# Altium PCB ExG_shield_old.PcbDoc (part 1 of 3)
Units mm, origin at the board's own origin, x right, y up, seen from the top; angles counter-clockwise.
Board outline 21.95 x 29 mm, 6 copper layers (Top Layer, GND/PWR1, SIG1, SIG2, GND/PWR2, Bottom Layer), stack 0.957 mm thick; 110 components, 127 nets, 621 pads, 432 vias.
Unrouted connection lines stored in the file: 2.
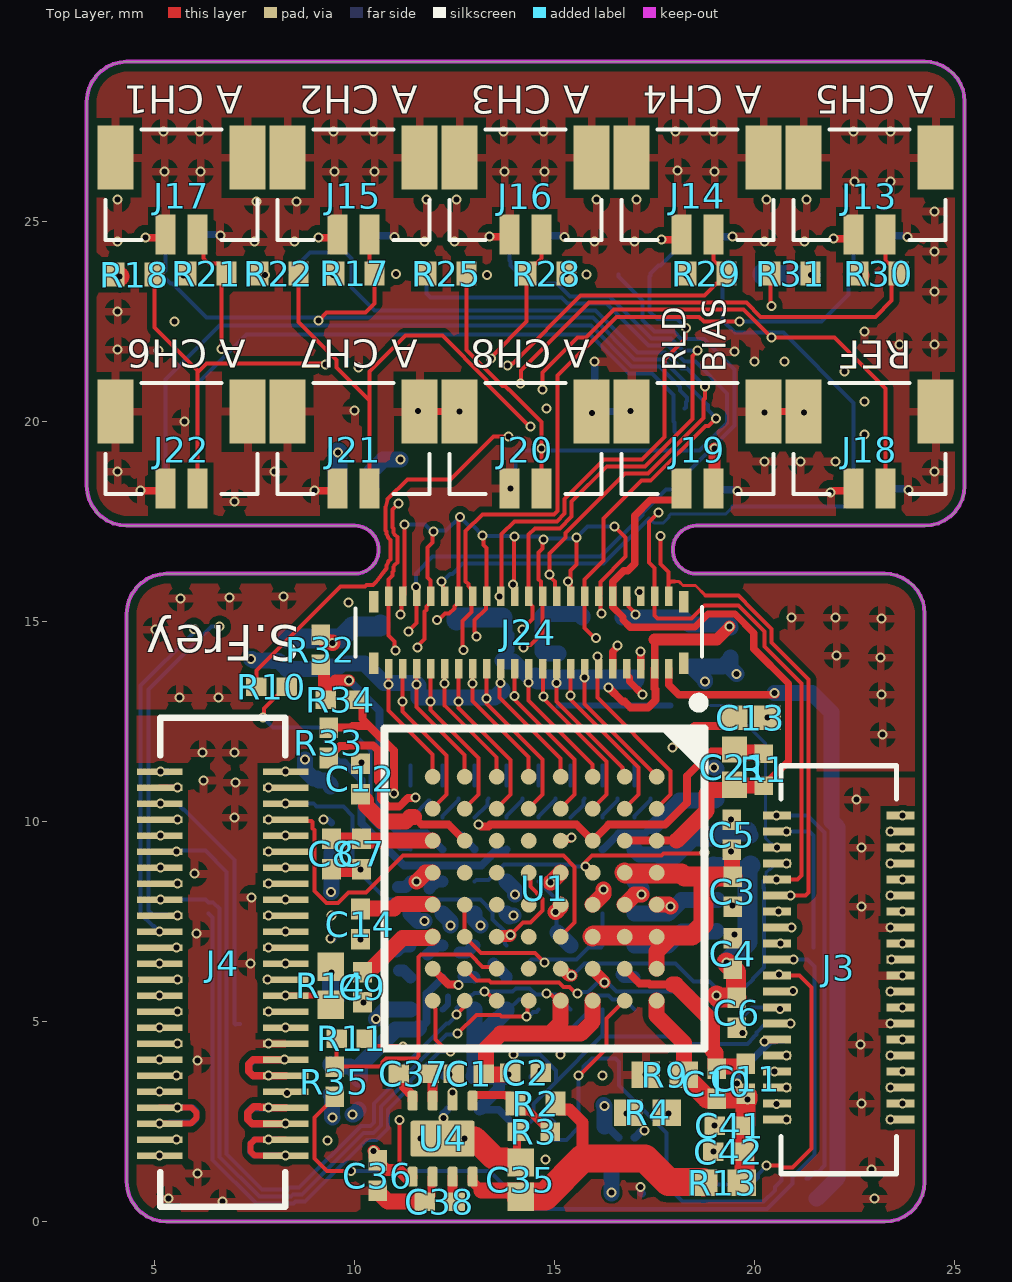
[diagram p0: Top Layer view]
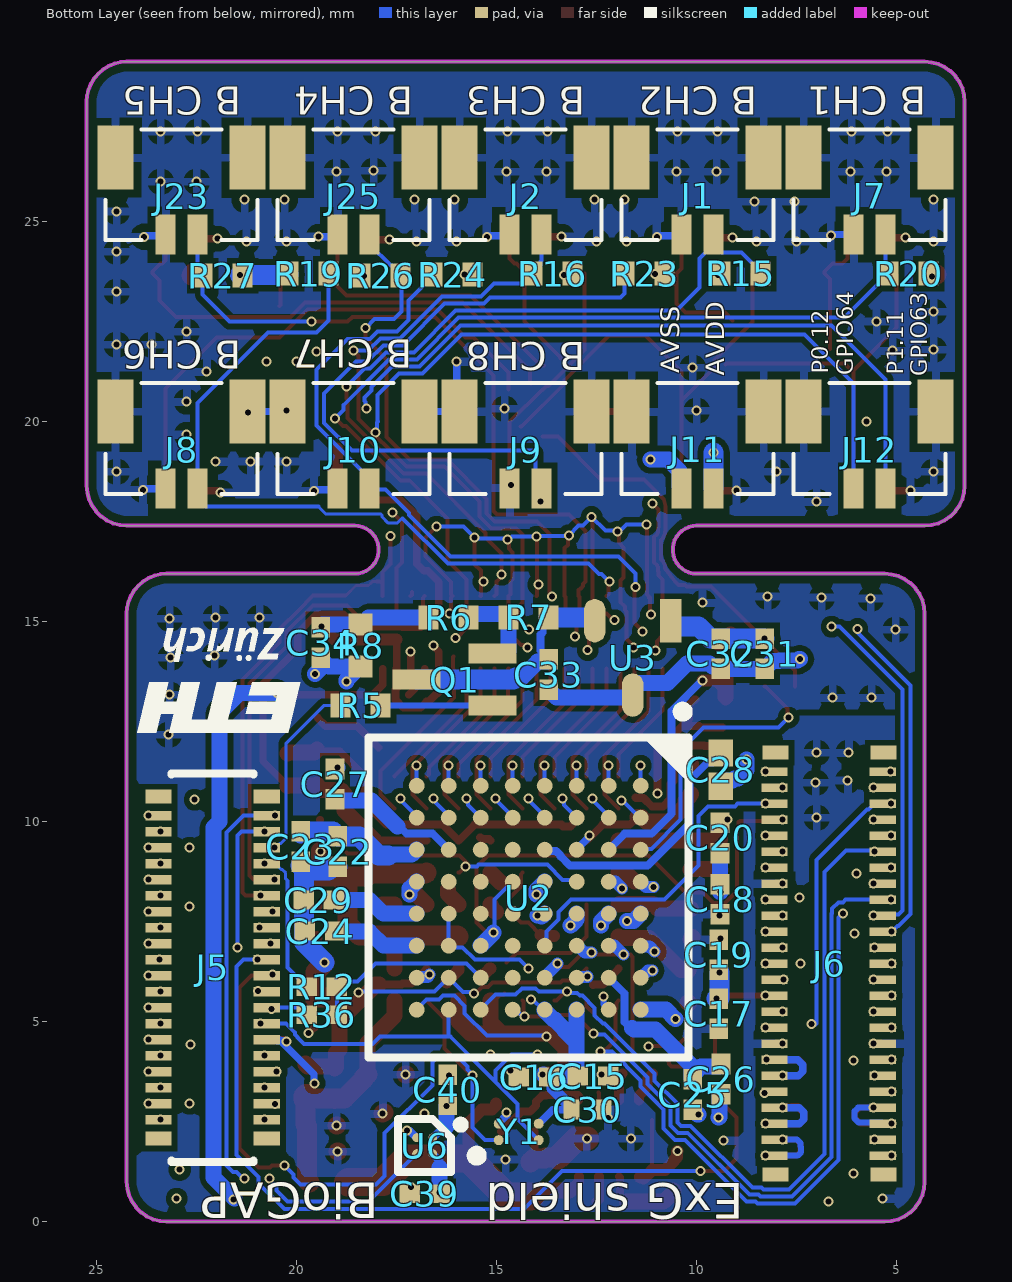
[diagram p1: Bottom Layer view, seen from below]
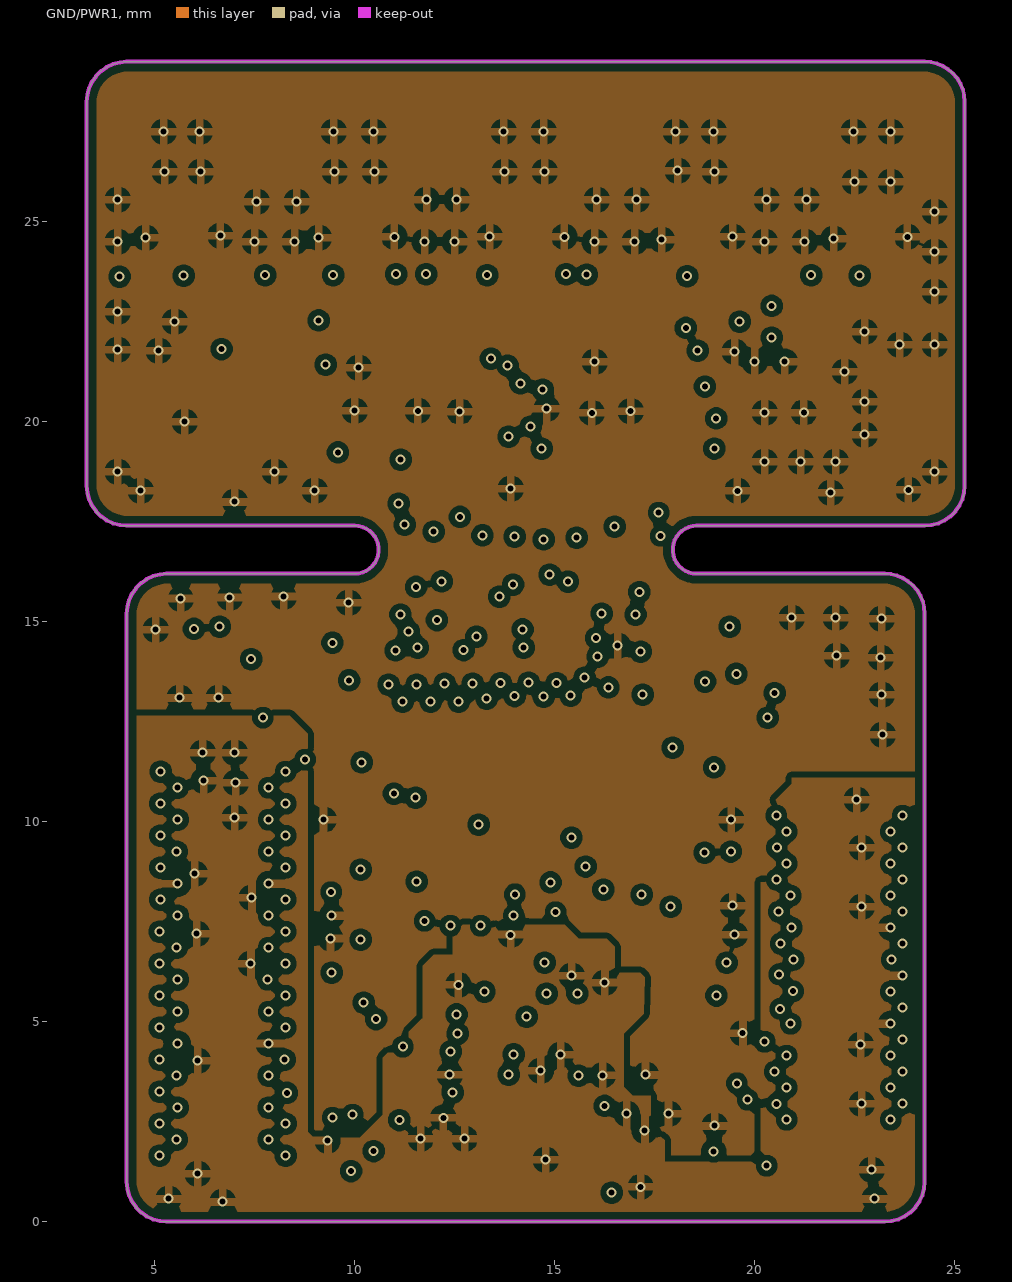
[diagram p2: GND/PWR1]
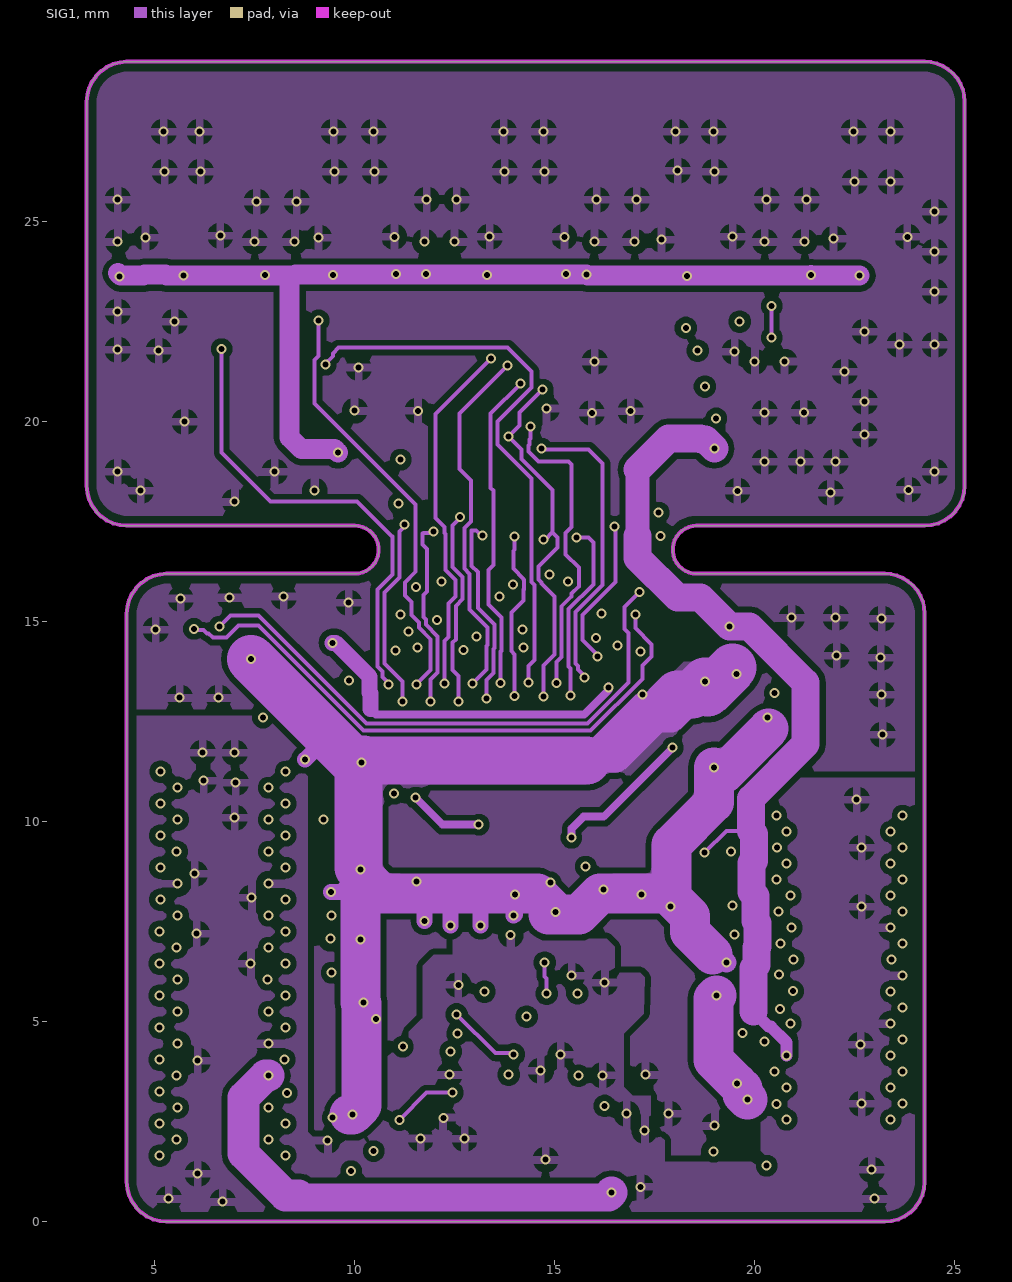
[diagram p3: SIG1]
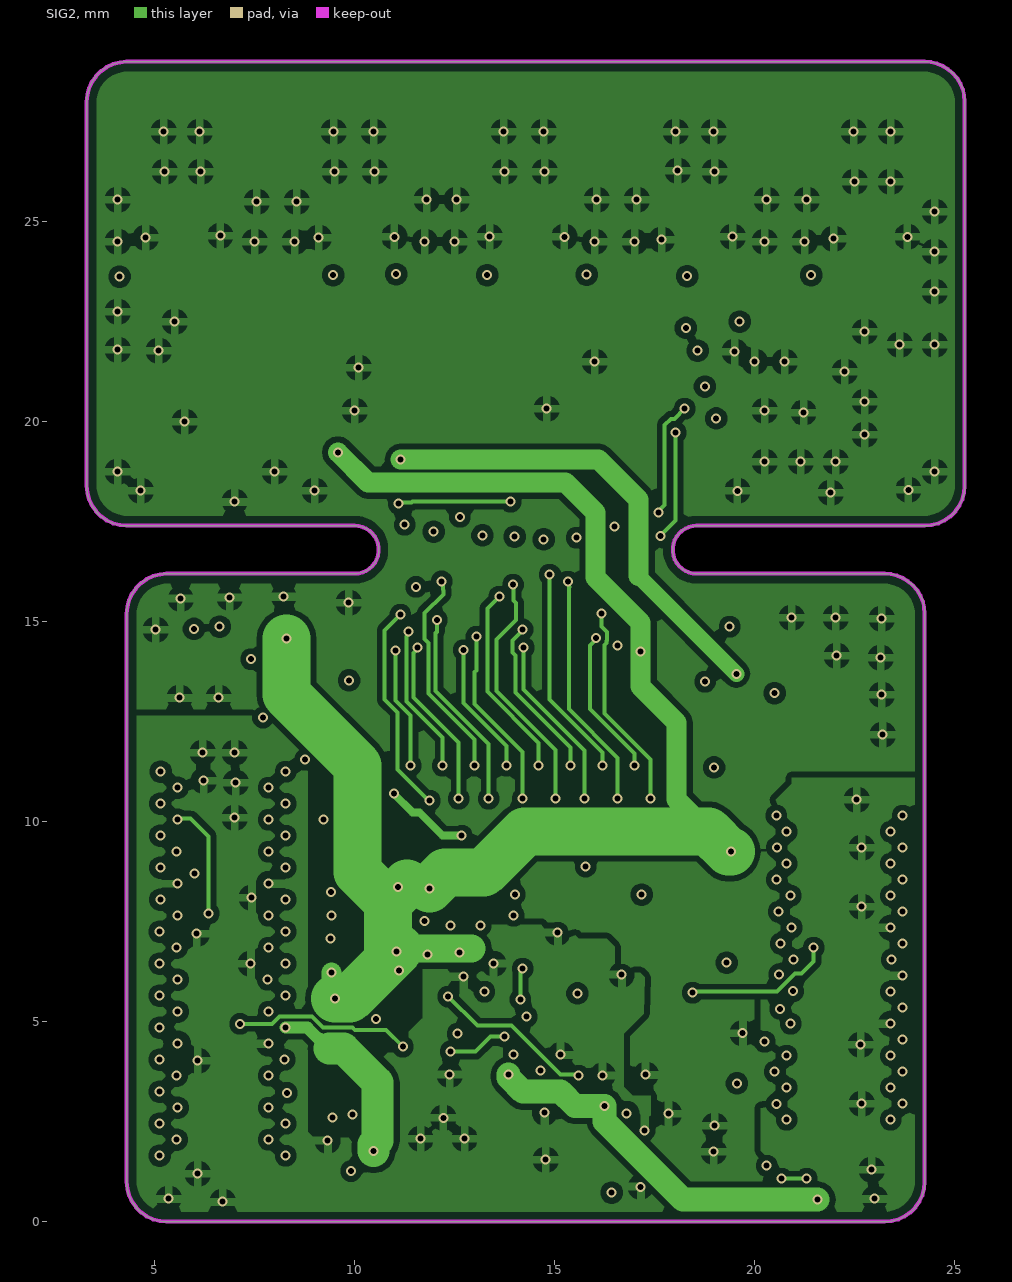
[diagram p4: SIG2]
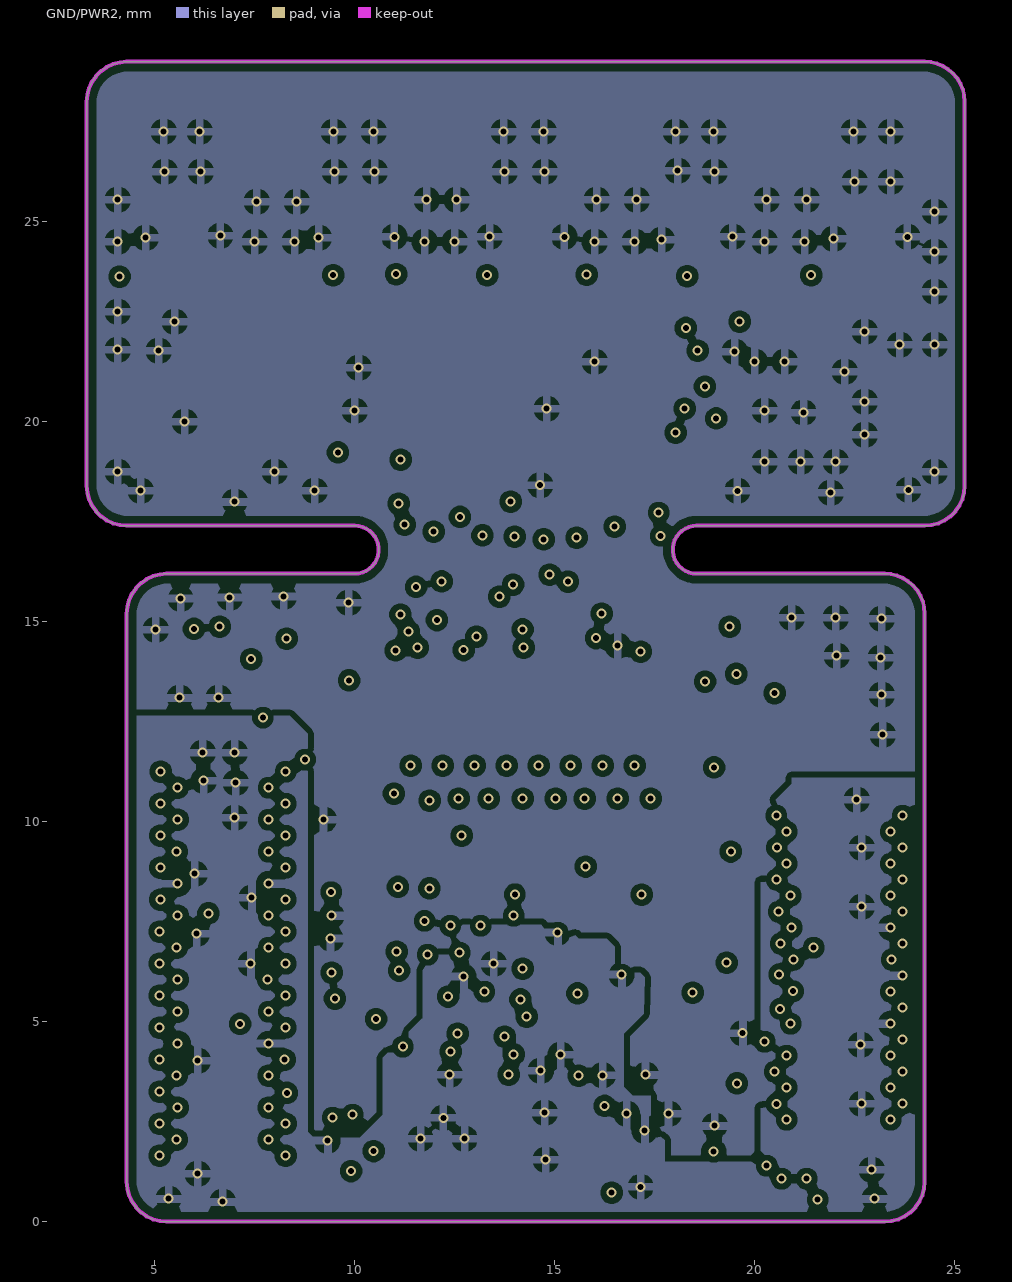
[diagram p5: GND/PWR2]
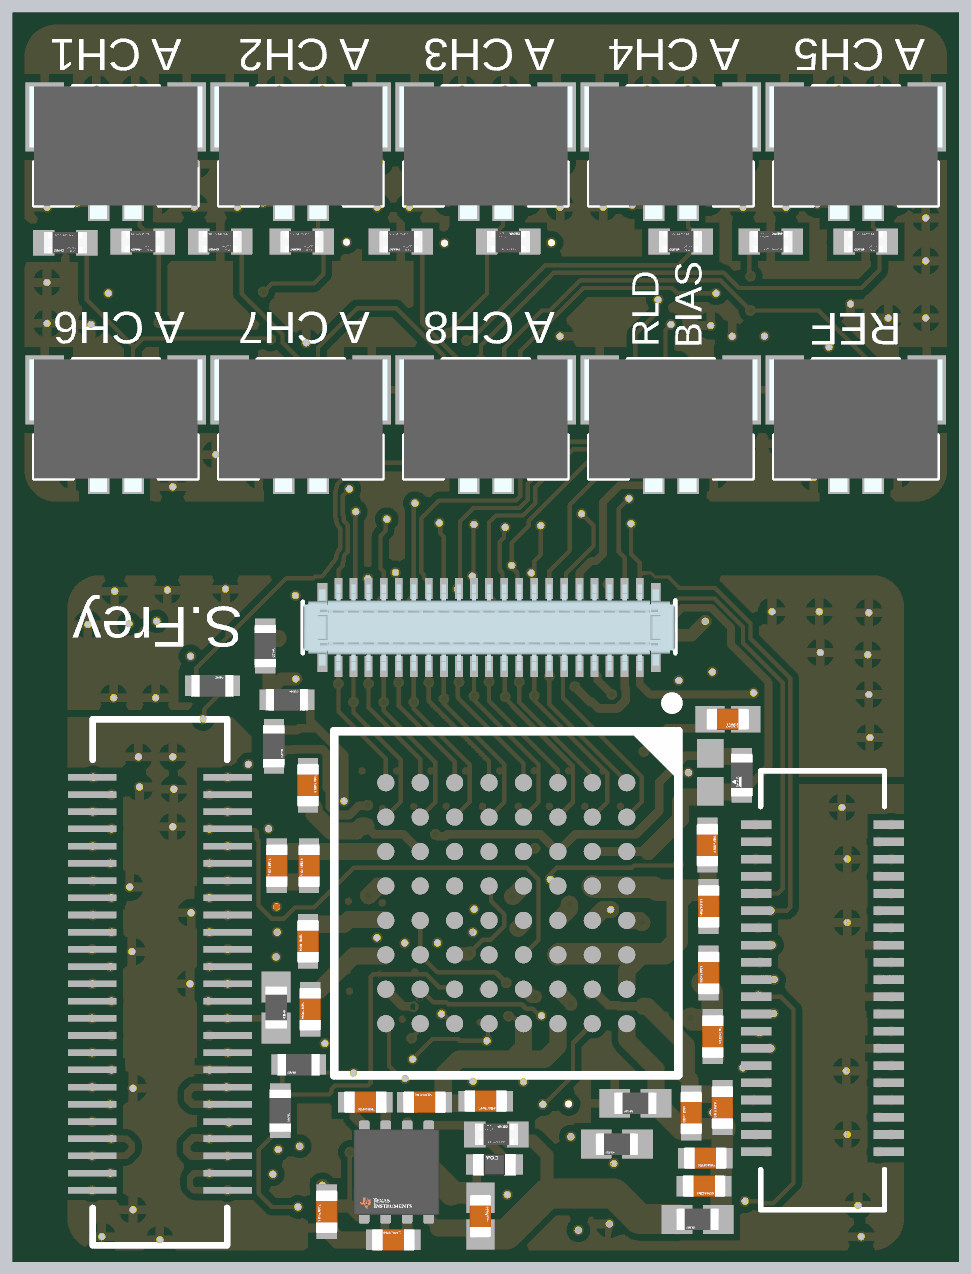
[diagram p7: 3D render of the assembled board from above, using the file's embedded part models]
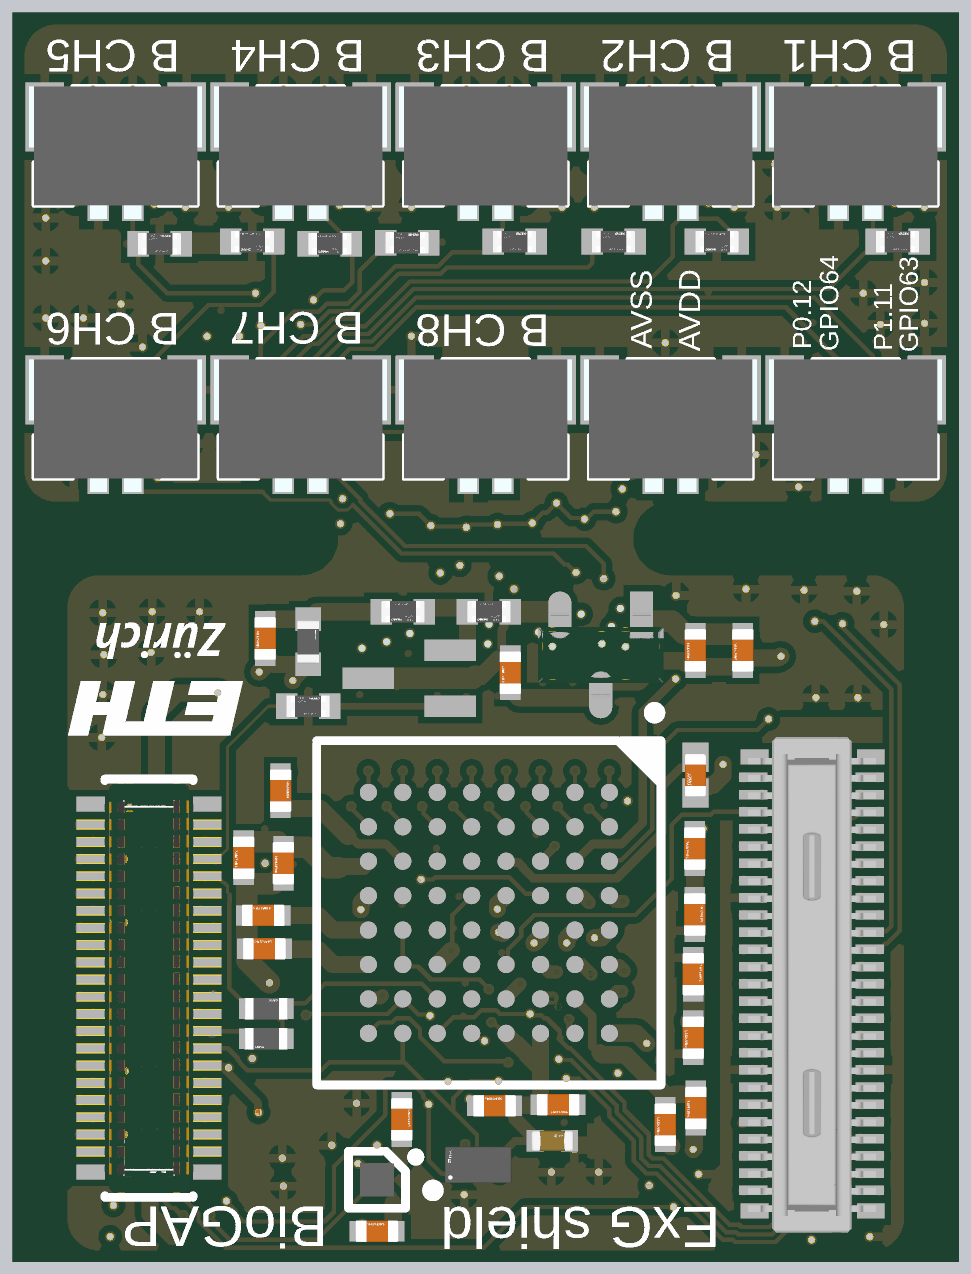
[diagram p8: 3D render of the assembled board from below, using the file's embedded part models]

## Layer stack, top to bottom
Top Solder: solder mask 0.0102, Solder Resist, Dk 3.5
Top Layer: signal copper 0.0175
Dielectric1: prepreg 0.13, PP-021, Dk 4.27
GND/PWR1: signal copper 0.0356
Dielectric2: core 0.13, Core-023, Dk 4.6
SIG1: signal copper 0.0356
Dielectric 1: prepreg 0.13, PP-021, Dk 4.27
Dielectric 2: prepreg 0.13, PP-021, Dk 4.27
SIG2: signal copper 0.0356
Dielectric 3: core 0.13, Core-023, Dk 4.6
GND/PWR2: signal copper 0.0356
Dielectric 4: prepreg 0.13, PP-021, Dk 4.27
Bottom Layer: signal copper 0.0175
Board Layer Stack Bottom Solder: solder mask 0.0102, Solder Resist, Dk 3.5

## Board outline
4.3,1 4.3,15.2 cw(c5.3,15.2) 5.3,16.2 10,16.2 ccw(c10,16.8) 10,17.4 4.3,17.4 cw(c4.3,18.4) 3.3,18.4 3.3,28 cw(c4.3,28) 4.3,29 24.25,29 cw(c24.25,28) 25.25,28 25.25,18.4 cw(c24.25,18.4) 24.25,17.4 18.55,17.4 ccw(c18.55,16.8) 18.55,16.2 23.25,16.2 cw(c23.25,15.2) 24.25,15.2 24.25,1 cw(c23.25,1) 23.25,0 5.3,0 cw(c5.3,1)

## Design rules (kind name [scope] priority, off if disabled: settings)
BoardOutlineClearance [All] p1: gap=0.25 ignorepadtopadclearanceinfootprint=FALSE except(0: Arc-SplitContinuation Track-SplitContinuation SMDPad-SplitContinuation THPad-SplitContinuation Via-SplitContinuation Fill-SplitContinuation Poly-SplitContinuation Region-SplitContinuation Text-SplitContinuation)
Clearance Clearance-xPP-xTP-xTT [All] p1: gap=0.1 ignorepadtopadclearanceinfootprint=TRUE except(0.075: Arc-Arc Arc-Track Track-Track; 0.15: Arc-Fill Arc-Poly Arc-Region Track-Fill Track-Poly Track-Region SMDPad-Fill SMDPad-Poly SMDPad-Region THPad-Fill THPad-Poly THPad-Region Via-Fill Via-Poly Via-Region Fill-Fill Fill-Poly Fill-Region Poly-Poly Poly-Region Region-Region)
ComponentClearance ComponentClearance_Mechanical [OnMechanical] p1: gap=0 collisioncheckmode=3 verticalgap=0 showdistances=FALSE
ComponentClearance [All] p2: gap=0.1 collisioncheckmode=3 verticalgap=0.1 showdistances=FALSE
DiffPairsRouting [All] p1: maxlimit=0.25 minlimit=0.15 mostfreqgap=0.25 toplayer_minwidth=0.15 toplayer_maxwidth=0.4 toplayer_prefwidth=0.2 midlayer1_minwidth=0.15 midlayer1_maxwidth=0.4 midlayer1_prefwidth=0.2 midlayer2_mingap=0.25 midlayer2_minwidth=0.381 midlayer2_maxwidth=0.381 midlayer2_prefwidth=0.381 midlayer3_mingap=0.25 midlayer3_minwidth=0.381 midlayer3_maxwidth=0.381 midlayer3_prefwidth=0.381 midlayer4_minwidth=0.15 midlayer4_maxwidth=0.4 midlayer4_prefwidth=0.2 bottomlayer_minwidth=0.15 bottomlayer_maxwidth=0.4 bottomlayer_prefwidth=0.2 maxuncoupledlength=12.5
Height [All] p1: minheight=0 maxheight=25 prefheight=12.5
HoleSize HoleSize-VIA [IsVia] p1: absolutevalues=TRUE maxlimit=6.2 minlimit=0.15 maxpercent=80.000 minpercent=20.000
HoleSize HoleSize-PTH [All] p2: absolutevalues=TRUE maxlimit=6.2 minlimit=0.2 maxpercent=80.000 minpercent=20.000
HoleToHoleClearance [All] p1: gap=0.3 allowstackedmicrovias=FALSE
MatchedLengths MatchedLengths_D100_InPair [InDifferentialPairClass('100Ohm')] p1: tolerance=0.1 checknetsindiffpair=TRUE checkdiffpairvsdiffpair=FALSE checkxsignals=FALSE checkothers=FALSE
MatchedLengths MatchedLengths_D100 [InDifferentialPairClass('100Ohm')] p2: tolerance=0.2 checknetsindiffpair=FALSE checkdiffpairvsdiffpair=TRUE checkxsignals=TRUE checkothers=TRUE
MaximumViaCount MaximumViaCount_D100 [InDifferentialPairClass('100Ohm')] p1: limit=2
MinimumSolderMaskSliver [All] p1: minsoldermaskwidth=0.08
PlaneClearance PlaneClearance-IPI [All] p1: clearance=0.25
PlaneConnect [All] p1: planeconnectstyle=Relief reliefexpansion=0.175 reliefentries=4 reliefconductorwidth=0.2 reliefairgap=0.2
PolygonConnect PolygonConnect-xTW [All] p1: connectstyle=Relief reliefconductorwidth=0.2 reliefentries=4 polygonreliefangle="90 Angle" airgapwidth=0.2
ReturnPath ReturnPath_S50 [InNetClass('50Ohm')] p1: impedanceprofileid={A2B40DEE-A9E4-4B6C-8169-857D678A89D5} _gaplimit=2.3
ReturnPath ReturnPath_D100 [InDifferentialPairClass('100Ohm')] p2: impedanceprofileid={66C9644C-2042-4FCB-B803-7A79EBC78C8C} _gaplimit=2.3
RoutingCorners [All] p1: cornerstyle=45-Degree minsetback=2.5 maxsetback=2.5
RoutingVias [All] p1: holewidth=0.15 width=0.25 viastyle="Through Hole" minholewidth=0.15 minwidth=0.25 maxholewidth=0.15 maxwidth=0.25 // finishet hole size <= 0.45mm
SilkToSilkClearance [All] p1: silktosilkclearance=0
SilkToSolderMaskClearance SilkscreenOverComponentPads [IsPad] p1: minsilkscreentomaskgap=0.05 clearancetoexposedcopper=TRUE
SolderMaskExpansion SolderMaskExpansion_VIA [(ObjectKind = 'Via')] p1: expansion=0 istentingtop=TRUE
SolderMaskExpansion [All] p2: expansion=0 istentingtop=FALSE
UnRoutedNet [All] p1: checkbadconnections=TRUE
Width Width_S50 [InNetClass('50Ohm')] p1: maxlimit=0.305 minlimit=0.104 preferedwidth=0.115 bottomlayer_minwidth=0.178 bottomlayer_prefwidth=0.246 impedanceprofiledriven=TRUE impedanceprofileid={A2B40DEE-A9E4-4B6C-8169-857D678A89D5} impedanceprofilevalue=50.000000 minimp=50.000000 maximp=50.000000 favimp=50.000000
Width Width-xTW [All] p2: maxlimit=1.5 minlimit=0.075 preferedwidth=0.1
Width [InNetClass('Power')] p3: maxlimit=2 minlimit=0.15 preferedwidth=0.2 midlayer2_minwidth=0.254 midlayer2_maxwidth=0.254 midlayer2_prefwidth=0.254 midlayer3_minwidth=0.254 midlayer3_maxwidth=0.254 midlayer3_prefwidth=0.254 minimp=50.000000 maximp=50.000000 favimp=50.000000
18 further rules are at their usual default settings.

## Classes and differential pairs
component class 03_electrode_interface: J1 J2 J7 J8 J9 J10 J11 J12 J13 J14 J15 J16 J17 J18 J19 J20 J21 J22 J23 J24 J25 R15 R16 R17 R18 R19 R20 R21 R22 R23 R24 R25 R26 R27 R28 R29 R30 R31
component class 01_power: C35 C36 C37 C38 C39 C40 C41 C42 R2 R3 R13 R14 U4 U6
component class 02_AFE: C1 C2 C3 C4 C5 C6 C7 C8 C9 C10 C11 C12 C13 C14 C15 C16 C17 C18 C19 C20 C21 C22 C23 C24 C25 C26 C27 C28 C29 C30 C31 C32 C33 C34 Q1 R1 R4 R5 R6 R7 R8 R9 R10 R11 R12 R32 R33 R34 R35 R36 U1 U2 U3 Y1
net class CSI2_DATA: CSI_D0_N CSI_D0_P
net class CSI2_CLK: CSI_CLK_N CSI_CLK_P
component class 04_gap_interface: J4 J5 J6

## Components (designator, comment, footprint, x,y, rotation, side; value= is the part's Value field where it differs from the comment)
C1 "CL05A104KA5NNNC" FP-CL278-IPC_C 12.85,3.7 r180 top
C2 "CL05A105KP5NNNC" FP-CL511-IPC_C 14.271,3.725 r0 top
C3 "CL05A104KA5NNNC" FP-CL278-IPC_C 19.45,8.25 r270 top
C4 "CL05A104KA5NNNC" FP-CL278-IPC_C 19.45,6.704 r270 top
C5 "CL05A105KP5NNNC" FP-CL511-IPC_C 19.425,9.675 r90 top
C6 "CL05A105KP5NNNC" FP-CL511-IPC_C 19.55,5.225 r90 top
C7 "CL05A104KA5NNNC" FP-CL278-IPC_C 10.167,9.194 r270 top
C8 "CL05A106MP8NUB8" FP-CL07-IPC_C 9.417,9.194 r270 top
C9 "CL05A105KP5NNNC" FP-CL511-IPC_C 10.192,5.861 r270 top
C10 "CL05A104KA5NNNC" FP-CL278-IPC_C 19.05,3.45 r270 top
C11 "CL05A105KP5NNNC" FP-CL511-IPC_C 19.775,3.575 r270 top
C12 "CL05A105KP5NNNC" FP-CL511-IPC_C 10.142,11.069 r90 top
C13 "04025C102KAT2A" FP-0402-L_1_0_1-W_0_5_0_1-IPC_B 19.9,12.6 r0 top
C14 "CL05A226MQ5QUNC" FP-CL746-IPC_C 10.142,7.44 r270 top
C15 "CL05A104KA5NNNC" FP-CL278-IPC_C 12.592,3.64 r180 bottom
C16 "CL05A105KP5NNNC" FP-CL511-IPC_C 14.067,3.615 r0 bottom
C17 "CL05A104KA5NNNC" FP-CL278-IPC_C 9.45,5.2 r270 bottom
C18 "CL05A104KA5NNNC" FP-CL278-IPC_C 9.417,8.061 r90 bottom
C19 "CL05A105KP5NNNC" FP-CL511-IPC_C 9.45,6.675 r90 bottom
C20 "CL05A105KP5NNNC" FP-CL511-IPC_C 9.417,9.594 r270 bottom
C21 "GRM155R71H152KA01D" CAPC1005X55X25NL05T10 19.492,11.365 r270 top
C22 "CL05A104KA5NNNC" FP-CL278-IPC_C 18.975,9.254 r270 bottom
C23 "CL05A106MP8NUB8" FP-CL07-IPC_C 19.9,9.379 r270 bottom
C24 "CL05A105KP5NNNC" FP-CL511-IPC_C 19.417,7.265 r0 bottom
C25 "CL05A104KA5NNNC" FP-CL278-IPC_C 10.1,3.179 r270 bottom
C26 "CL05A105KP5NNNC" FP-CL511-IPC_C 9.392,3.565 r270 bottom
C27 "CL05A105KP5NNNC" FP-CL511-IPC_C 19.042,10.94 r90 bottom
C28 "04025C102KAT2A" FP-0402-L_1_0_1-W_0_5_0_1-IPC_B 9.4,11.3 r270 bottom
C29 "CL05A226MQ5QUNC" FP-CL746-IPC_C 19.446,8.04 r0 bottom
C30 "CGA2B3X7R1V103K050BB" FP-CGA2B-MFG 12.725,2.8 r180 bottom
C31 "CL05A106MP8NUB8" FP-CL07-IPC_C 8.3,14.2 r270 bottom
C32 "CL05A104KA5NNNC" FP-CL278-IPC_C 9.4,14.2 r270 bottom
C33 "CL05A104KA5NNNC" FP-CL278-IPC_C 13.7,13.679 r270 bottom
C34 "CL05A104KA5NNNC" FP-CL278-IPC_C 19.4,14.479 r270 bottom
C35 "GRM155Z71A225KE01D" FP-GRM155-0_15-IPC_B 14.15,1.052 r90 top
C36 "CL05A475MP5NRNC" FP-CL282-IPC_C 10.575,1.154 r270 top
C37 "CL05A105KP5NNNC" FP-CL511-IPC_C 11.475,3.7 r0 top
C38 "CL05A475MP5NRNC" FP-CL282-IPC_C 12.125,0.5 r180 top
C39 "CL05A105KP5NNNC" FP-CL511-IPC_C 16.8,0.7 r0 bottom
C40 "CL05A104KA5NNNC" FP-CL278-IPC_C 16.225,3.3 r90 bottom
C41 "CL05A104KA5NNNC" FP-CL278-IPC_C 19.375,2.4 r0 top
C42 "CL05A105KP5NNNC" FP-CL511-IPC_C 19.346,1.75 r0 top
J1 "DF52-2S-0.8H_21_" DF522S08H21 9.975,25.57 r0 bottom
J2 "DF52-2S-0.8H_21_" DF522S08H21 14.275,25.57 r0 bottom
J3 "DF40HC(2.5)-40DS-0.4V(51)" DF40HC3040DS04V51 22.1,6.35 r270 top locked
J4 "DF40HC(2.5)-50DS-0.4V(51)" DF40HC3050DS04V51 6.7,6.45 r90 top locked
J5 "DF40C-40DP-0.4V(51)" FP-DF40C-40DP-0_4V_51-MFG 22.1,6.35 r270 bottom locked
J6 "DF40C-50DP-0.4V(51)" CONN_COMBI_50P 6.7,6.45 r0 bottom locked
J7 "DF52-2S-0.8H_21_" DF522S08H21 5.675,25.57 r0 bottom
J8 "DF52-2S-0.8H_21_" DF522S08H21 22.875,19.225 r0 bottom
J9 "DF52-2S-0.8H_21_" DF522S08H21 14.275,19.225 r0 bottom
J10 "DF52-2S-0.8H_21_" DF522S08H21 18.575,19.225 r0 bottom
J11 "DF52-2S-0.8H_21_" DF522S08H21 9.975,19.225 r0 bottom
J12 "DF52-2S-0.8H_21_" DF522S08H21 5.675,19.225 r0 bottom
J13 "DF52-2S-0.8H_21_" DF522S08H21 22.875,25.57 r180 top
J14 "DF52-2S-0.8H_21_" DF522S08H21 18.575,25.57 r180 top
J15 "DF52-2S-0.8H_21_" DF522S08H21 9.975,25.57 r180 top
J16 "DF52-2S-0.8H_21_" DF522S08H21 14.275,25.57 r180 top
J17 "DF52-2S-0.8H_21_" DF522S08H21 5.675,25.57 r180 top
J18 "DF52-2S-0.8H_21_" DF522S08H21 22.875,19.225 r180 top
J19 "DF52-2S-0.8H_21_" DF522S08H21 18.575,19.225 r180 top
J20 "DF52-2S-0.8H_21_" DF522S08H21 14.275,19.225 r180 top
J21 "DF52-2S-0.8H_21_" DF522S08H21 9.975,19.225 r180 top
J22 "DF52-2S-0.8H_21_" DF522S08H21 5.675,19.225 r180 top
J23 "DF52-2S-0.8H_21_" DF522S08H21 22.875,25.57 r0 bottom
J24 "505070-4222" 5050704222 14.35,14.732 r180 top
J25 "DF52-2S-0.8H_21_" DF522S08H21 18.575,25.57 r0 bottom
Q1 "PMSS3906" SOT323_N 16.05,13.55 r0 bottom
R1 "MCS04020C1004FE000" FP-MCS0402-IPC_C 20.225,11.3 r270 top
R2 "RT0402BRD0745K3L" FP-RT0402-MFG 14.522,2.95 r0 top value=45.3KΩ
R3 "RN73R1ETTP2003B25" FP-RN73R1E-IPC_C 14.475,2.25 r180 top
R4 "RC0402FR-070RL" FP-RC0402-0_4-IPC_A 17.321,2.725 r180 top
R5 "RT0402FRE074K7L" FP-RT0402-MFG 18.4,12.9 r180 bottom value=4.7KΩ
R6 "RT0402FRE074K7L" FP-RT0402-MFG 16.2,15.1 r0 bottom value=4.7KΩ
R7 "RT0402FRE074K7L" FP-RT0402-MFG 14.2,15.1 r0 bottom value=4.7KΩ
R8 "RR0510P-563-D" FP-RR0510-MFG 18.4,14.4 r90 bottom
R9 "RC0402FR-070RL" FP-RC0402-0_4-IPC_A 17.75,3.675 r180 top
R10 "RC0402FR-070RL" FP-RC0402-0_4-IPC_C 7.921,13.375 r0 top
R11 "RC0402FR-070RL" FP-RC0402-0_4-IPC_C 9.925,4.575 r180 top
R12 "RC0402FR-070RL" FP-RC0402-0_4-IPC_C 19.375,5.875 r180 bottom
R13 "RC0402FR-070RL" FP-RC0402-0_4-IPC_A 19.196,0.975 r180 top
R14 "RC0402FR-070RL" FP-RC0402-0_4-IPC_A 9.4,5.9 r270 top
R15 "RT0402FRE074K7L" FP-RT0402-MFG 8.9,23.7 r0 bottom value=4.7KΩ
R16 "RT0402FRE074K7L" FP-RT0402-MFG 13.6,23.7 r180 bottom value=4.7KΩ
R17 "RT0402FRE074K7L" FP-RT0402-MFG 10,23.7 r180 top value=4.7KΩ
R18 "RT0402FRE074K7L" FP-RT0402-MFG 4.5,23.675 r180 top value=4.7KΩ
R19 "RT0402FRE074K7L" FP-RT0402-MFG 19.7,23.7 r0 bottom value=4.7KΩ
R20 "RT0402FRE074K7L" FP-RT0402-MFG 4.7,23.7 r180 bottom value=4.7KΩ
R21 "RT0402FRE074K7L" FP-RT0402-MFG 6.3,23.7 r180 top value=4.7KΩ
R22 "RT0402FRE074K7L" FP-RT0402-MFG 8.1,23.7 r180 top value=4.7KΩ
R23 "RT0402FRE074K7L" FP-RT0402-MFG 11.3,23.7 r180 bottom value=4.7KΩ
R24 "RT0402FRE074K7L" FP-RT0402-MFG 16.1,23.675 r180 bottom value=4.7KΩ
R25 "RT0402FRE074K7L" FP-RT0402-MFG 12.3,23.7 r180 top value=4.7KΩ
R26 "RT0402FRE074K7L" FP-RT0402-MFG 17.9,23.65 r0 bottom value=4.7KΩ
R27 "RT0402FRE074K7L" FP-RT0402-MFG 21.85,23.65 r180 bottom value=4.7KΩ
R28 "RT0402FRE074K7L" FP-RT0402-MFG 14.8,23.7 r0 top value=4.7KΩ
R29 "RT0402FRE074K7L" FP-RT0402-MFG 18.8,23.7 r180 top value=4.7KΩ
R30 "RT0402FRE074K7L" FP-RT0402-MFG 23.1,23.7 r180 top value=4.7KΩ
R31 "RT0402FRE074K7L" FP-RT0402-MFG 20.9,23.7 r0 top value=4.7KΩ
R32 "RC0402FR-070RL" FP-RC0402-0_4-IPC_C 9.15,14.3 r270 top
R33 "RC0402FR-070RL" FP-RC0402-0_4-IPC_C 9.35,11.971 r270 top
R34 "RC0402FR-070RL" FP-RC0402-0_4-IPC_C 9.654,13.05 r0 top
R35 "RC0402FR-070RL" FP-RC0402-0_4-IPC_C 9.5,3.5 r270 top
R36 "RC0402FR-070RL" FP-RC0402-0_4-IPC_C 19.375,5.175 r0 bottom
U1 "ADS1298RIZXGT" TI-ZXG64 14.75,8.325 r270 top
U2 "ADS1298RIZXGT" TI-ZXG64 14.2,8.1 r270 bottom
U3 "ISL21080CIH320Z-TK" FP-P3_064A-IPC_C 11.6,14.095 r270 bottom
U4 "LM27761DSGT" FP-DSG0008A-MFG 12.197,2.075 r90 top
U6 "TPS22916CYFPR" BGA4C40P2X2_78X78X50 16.8,1.9 r270 bottom
Y1 "SIT8021AC-J3-18S-2.048000" FP-SiT8021-MFG 14.45,2.245 r180 bottom

## Footprints (in the part's own frame and the unit in brackets; to place one, negate y for a bottom-side part, rotate by r counter-clockwise, add the part's x,y. Pads: shape width x height; smd on the part's side, far side on the other; paste and mask are expansions set on the pad)
5050704222 [mm]
  rect 0.18x0.485 smd: 1(-3.5,-0.907) 2(-3.5,0.907) 3(-3.15,-0.907) 4(-3.15,0.907) 5(-2.8,-0.907) 6(-2.8,0.907) 7(-2.45,-0.907) 8(-2.45,0.907) 9(-2.1,-0.907) 10(-2.1,0.907) 11(-1.75,-0.907) 12(-1.75,0.907) 13(-1.4,-0.907) 14(-1.4,0.907) 15(-1.05,-0.907) 16(-1.05,0.907) 17(-0.7,-0.907) 18(-0.7,0.907) 19(-0.35,-0.907) 20(-0.35,0.907) 21(0,-0.907) 22(0,0.907) 23(0.35,-0.907) 24(0.35,0.907) 25(0.7,-0.907) 26(0.7,0.907) 27(1.05,-0.907) 28(1.05,0.907) 29(1.4,-0.907) 30(1.4,0.907) 31(1.75,-0.907) 32(1.75,0.907) 33(2.1,-0.907) 34(2.1,0.907) 35(2.45,-0.907) 36(2.45,0.907) 37(2.8,-0.907) 38(2.8,0.907) 39(3.15,-0.907) 40(3.15,0.907) 41(3.5,-0.907) 42(3.5,0.907)
  rect 0.23x0.535 smd: MP1(-3.875,-0.768) MP2(3.875,-0.768) MP3(3.875,0.768) MP4(-3.875,0.768)
  silkscreen extent -4.33,-0.63 4.33,0.6, body extent -4.33,-1 4.33,1, height 0.49
BGA4C40P2X2_78X78X50 [mm]
  round 0.226 smd: A1(-0.2,0.2) A2(0.2,0.2) B1(-0.2,-0.2) B2(0.2,-0.2)
  silkscreen extent -0.66,-0.66 0.66,1, body extent -0.39,-0.39 0.39,0.39, height 0.5
CAPC1005X55X25NL05T10 [mm] "Chip Capacitor, 2-Leads, Body 1.00x0.50mm, IPC Medium Density"
  rect 0.66x0.62 smd: 1(-0.44,0) 2(0.44,0)
  body extent -0.53,-0.28 0.53,0.27, height 0.55
CONN_COMBI_50P [mm] "50Pin 0.4mm pitch connector footprint that accepts (male) connectors intended for different stacking heights:  Hirose - DF40C-50DP-0.4V(51) for 1.5mm - 3mm stacking height , JAE - WP7B-P050VA1-R8000 - for 0.7mm stacking height"
  rect 0.66x0.22 smd: 1(1.355,4.8) 2(1.355,4.4) 3(1.355,4) 4(1.355,3.6) 5(1.355,3.2) 6(1.355,2.8) 7(1.355,2.4) 8(1.355,2) 9(1.355,1.6) 10(1.355,1.2) 11(1.355,0.8) 12(1.355,0.4) 13(1.355,0) 14(1.355,-0.4) 15(1.355,-0.8) 16(1.355,-1.2) 17(1.355,-1.6) 18(1.355,-2) 19(1.355,-2.4) 20(1.355,-2.8) 21(1.355,-3.2) 22(1.355,-3.6) 23(1.355,-4) 24(1.355,-4.4) 25(1.355,-4.8) 26(-1.355,-4.8) 27(-1.355,-4.4) 28(-1.355,-4) 29(-1.355,-3.6) 30(-1.355,-3.2) 31(-1.355,-2.8) 32(-1.355,-2.4) 33(-1.355,-2) 34(-1.355,-1.6) 35(-1.355,-1.2) 36(-1.355,-0.8) 37(-1.355,-0.4) 38(-1.355,0) 39(-1.355,0.4) 40(-1.355,0.8) 41(-1.355,1.2) 42(-1.355,1.6) 43(-1.355,2) 44(-1.355,2.4) 45(-1.355,2.8) 46(-1.355,3.2) 47(-1.355,3.6) 48(-1.355,4) 49(-1.355,4.4) 50(-1.355,4.8)
  rect 0.65x0.35 smd: 56(-1.375,-5.275) 56(-1.375,5.275) 56(1.325,-5.275) 56(1.325,5.275)
  body extent -1.49,-5.74 1.48,5.78, height 1.14
DF40HC3040DS04V51 [mm]
  rect 0.2x0.7 smd: 1(-3.8,1.54) 2(-3.8,-1.54) 3(-3.4,1.54) 4(-3.4,-1.54) 5(-3,1.54) 6(-3,-1.54) 7(-2.6,1.54) 8(-2.6,-1.54) 9(-2.2,1.54) 10(-2.2,-1.54) 11(-1.8,1.54) 12(-1.8,-1.54) 13(-1.4,1.54) 14(-1.4,-1.54) 15(-1,1.54) 16(-1,-1.54) 17(-0.6,1.54) 18(-0.6,-1.54) 19(-0.2,1.54) 20(-0.2,-1.54) 21(0.2,1.54) 22(0.2,-1.54) 23(0.6,1.54) 24(0.6,-1.54) 25(1,1.54) 26(1,-1.54) 27(1.4,1.54) 28(1.4,-1.54) 29(1.8,1.54) 30(1.8,-1.54) 31(2.2,1.54) 32(2.2,-1.54) 33(2.6,1.54) 34(2.6,-1.54) 35(3,1.54) 36(3,-1.54) 37(3.4,1.54) 38(3.4,-1.54) 39(3.8,1.54) 40(3.8,-1.54)
  silkscreen extent -5.05,-1.44 5.15,1.44
DF40HC3050DS04V51 [mil]
  rect 6x44.56 smd paste+0 mask+0: 1(-188.98,-62) 2(-173.23,-62) 3(-157.48,-62) 4(-141.73,-62) 5(-125.98,-62) 6(-110.24,-62) 7(-94.49,-62) 8(-78.74,-62) 9(-62.99,-62) 10(-47.24,-62) 11(-31.5,-62) 12(-15.75,-62) 13(0,-62) 14(15.75,-62) 15(31.5,-62) 16(47.24,-62) 17(62.99,-62) 18(78.74,-62) 19(94.49,-62) 20(110.24,-62) 21(125.98,-62) 22(141.73,-62) 23(157.48,-62) 24(173.23,-62) 25(188.98,-62) 26(188.98,62) 27(173.23,62) 28(157.48,62) 29(141.73,62) 30(125.98,62) 31(110.24,62) 32(94.49,62) 33(78.74,62) 34(62.99,62) 35(47.24,62) 36(31.5,62) 37(15.75,62) 38(0,62) 39(-15.75,62) 40(-31.5,62) 41(-47.24,62) 42(-62.99,62) 43(-78.74,62) 44(-94.49,62) 45(-110.24,62) 46(-125.98,62) 47(-141.73,62) 48(-157.48,62) 49(-173.23,62) 50(-188.98,62)
  silkscreen extent -239,-62 242,62
DF522S08H21 [mm]
  rect 0.5x1 smd: 1(-0.4,0.89) 2(0.4,0.89)
  rect 0.9x1.6 smd: 3(-1.65,-1.03) 4(1.65,-1.03)
  silkscreen extent -1.9,-1.74 1.9,1.03, body extent -2.01,-1.74 2.01,1.34, height 1.1
FP-0402-L_1_0_1-W_0_5_0_1-IPC_B [mm]
  rect 0.681x0.612 smd paste+0 mask+0: 1(-0.416,0) 2(0.416,0)
  body extent -0.91,-0.46 0.91,0.46, height 0.25
FP-CGA2B-MFG [mm]
  rect 0.4x0.5 smd paste+0 mask+0: 1(-0.4,0) 2(0.4,0)
  body extent -0.5,-0.25 0.5,0.25, height 0.55
FP-CL07-IPC_C [mm]
  rect 0.515x0.472 smd paste+0 mask+0: 1(-0.379,0) 2(0.379,0)
  body extent -0.74,-0.38 0.74,0.38, height 0.25
FP-CL278-IPC_C [mm]
  rect 0.515x0.472 smd paste+0 mask+0: 1(-0.379,0) 2(0.379,0)
  body extent -0.74,-0.38 0.74,0.38, height 0.25
FP-CL282-IPC_C [mm]
  rect 0.515x0.472 smd paste+0 mask+0: 1(-0.379,0) 2(0.379,0)
  body extent -0.74,-0.38 0.74,0.38, height 0.25
FP-CL511-IPC_C [mm]
  rect 0.515x0.472 smd paste+0 mask+0: 1(-0.379,0) 2(0.379,0)
  body extent -0.74,-0.38 0.74,0.38, height 0.25
FP-CL746-IPC_C [mm]
  rect 0.515x0.472 smd paste+0 mask+0: 1(-0.379,0) 2(0.379,0)
  body extent -0.74,-0.38 0.74,0.38, height 0.25
FP-DF40C-40DP-0_4V_51-MFG [mm]
  rect 0.23x0.66 smd paste-1000 mask+0: 1(-3.8,-1.355) 2(-3.8,1.355) 3(-3.4,-1.355) 4(-3.4,1.355) 5(-3,-1.355) 6(-3,1.355) 7(-2.6,-1.355) 8(-2.6,1.355) 9(-2.2,-1.355) 10(-2.2,1.355) 11(-1.8,-1.355) 12(-1.8,1.355) 13(-1.4,-1.355) 14(-1.4,1.355) 15(-1,-1.355) 16(-1,1.355) 17(-0.6,-1.355) 18(-0.6,1.355) 19(-0.2,-1.355) 20(-0.2,1.355) 21(0.2,-1.355) 22(0.2,1.355) 23(0.6,-1.355) 24(0.6,1.355) 25(1,-1.355) 26(1,1.355) 27(1.4,-1.355) 28(1.4,1.355) 29(1.8,-1.355) 30(1.8,1.355) 31(2.2,-1.355) 32(2.2,1.355) 33(2.6,-1.355) 34(2.6,1.355) 35(3,-1.355) 36(3,1.355) 37(3.4,-1.355) 38(3.4,1.355) 39(3.8,-1.355) 40(3.8,1.355)
  rect 0.35x0.66 smd paste+0 mask+0: 41(-4.275,1.355) 42(4.275,1.355) 43(-4.275,-1.355) 44(4.275,-1.355)
  silkscreen extent -4.86,-1.02 4.86,1.02, body extent -4.76,-1.49 4.76,1.48, height 1.29
FP-DSG0008A-MFG [mm]
  rrect40% 0.5x0.25 smd paste+0 mask+0: 1(-0.95,0.75) 2(-0.95,0.25) 3(-0.95,-0.25) 4(-0.95,-0.75) 5(0.95,-0.75) 6(0.95,-0.25) 7(0.95,0.25) 8(0.95,0.75)
  rrect11% 0.9x1.6 smd paste-1000 mask+0: 9(0,0)
  body extent -1.3,-1.15 1.3,1.15, height 0.25
FP-GRM155-0_15-IPC_B [mm]
  rect 0.704x0.658 smd paste+0 mask+0: 1(-0.427,0) 2(0.427,0)
  body extent -0.93,-0.48 0.93,0.48, height 0.25
FP-MCS0402-IPC_C [mm]
  rect 0.465x0.472 smd paste+0 mask+0: 1(-0.404,0) 2(0.404,0)
  body extent -0.74,-0.38 0.74,0.38, height 0.25
FP-P3_064A-IPC_C [mm]
  rect 1.084x0.538 smd paste+0 mask+0: 1(-0.93,0.95)
  rrect100% 1.084x0.538 smd paste+0 mask+0: 2(-0.93,-0.95) 3(0.93,0)
  body extent -1.18,-1.46 1.18,1.46, height 1.12
FP-RC0402-0_4-IPC_A [mm]
  rect 0.715x0.672 smd paste+0 mask+0: 1(-0.479,0) 2(0.479,0)
  body extent -1.04,-0.54 1.04,0.54, height 0.25
FP-RC0402-0_4-IPC_C [mm]
  rect 0.515x0.472 smd paste+0 mask+0: 1(-0.379,0) 2(0.379,0)
  body extent -0.5,-0.25 0.5,0.25, height 0.4
FP-RN73R1E-IPC_C [mm]
  rect 0.488x0.472 smd paste+0 mask+0: 1(-0.414,0) 2(0.414,0)
  body extent -0.76,-0.38 0.76,0.38, height 0.25
FP-RR0510-MFG [mm]
  rect 0.55x0.6 smd paste+0 mask+0: 1(-0.525,0) 2(0.525,0)
  body extent -0.5,-0.25 0.5,0.25, height 0.4
FP-RT0402-MFG [mm]
  rect 0.5x0.6 smd paste+0 mask+0: 1(-0.5,0) 2(0.5,0)
  body extent -0.85,-0.4 0.85,0.4, height 0.25
FP-SiT8021-MFG [mm]
  round 0.25 smd paste+0 mask+0: 1(-0.5,-0.205) 2(0.5,-0.205) 3(0.5,0.205) 4(-0.5,0.205)
  silkscreen extent -1.18,-0.72 -0.93,-0.47, body extent -0.77,-0.42 0.77,0.42, height 0.6
SOT323_N [mm]
  rect 1.2x0.5 smd: 1(-0.95,0.65) 2(-0.95,-0.65) 3(0.95,0)
  body extent -0.7,-1.1 0.7,1.1, height 1.1
TI-ZXG64 [mm] "BGA, 64-Balls, Body 8x8mm, Pitch 0.8mm"
  round 0.4 smd: A1(-2.8,2.8) A2(-2,2.8) A3(-1.2,2.8) A4(-0.4,2.8) A5(0.4,2.8) A6(1.2,2.8) A7(2,2.8) A8(2.8,2.8) B1(-2.8,2) B2(-2,2) B3(-1.2,2) B4(-0.4,2) B5(0.4,2) B6(1.2,2) B7(2,2) B8(2.8,2) C1(-2.8,1.2) C2(-2,1.2) C3(-1.2,1.2) C4(-0.4,1.2) C5(0.4,1.2) C6(1.2,1.2) C7(2,1.2) C8(2.8,1.2) D1(-2.8,0.4) D2(-2,0.4) D3(-1.2,0.4) D4(-0.4,0.4) D5(0.4,0.4) D6(1.2,0.4) D7(2,0.4) D8(2.8,0.4) E1(-2.8,-0.4) E2(-2,-0.4) E3(-1.2,-0.4) E4(-0.4,-0.4) E5(0.4,-0.4) E6(1.2,-0.4) E7(2,-0.4) E8(2.8,-0.4) F1(-2.8,-1.2) F2(-2,-1.2) F3(-1.2,-1.2) F4(-0.4,-1.2) F5(0.4,-1.2) F6(1.2,-1.2) F7(2,-1.2) F8(2.8,-1.2) G1(-2.8,-2) G2(-2,-2) G3(-1.2,-2) G4(-0.4,-2) G5(0.4,-2) G6(1.2,-2) G7(2,-2) G8(2.8,-2) H1(-2.8,-2.8) H2(-2,-2.8) H3(-1.2,-2.8) H4(-0.4,-2.8) H5(0.4,-2.8) H6(1.2,-2.8) H7(2,-2.8) H8(2.8,-2.8)
  silkscreen extent -4.77,-4 4,4, body extent -4,-4 4,4, height 1.45

## Part data
C1 C3 C4 C7 C10 C15 C17 C18 C22 C25 C32 C33 C34 C40 C41: library part CMP-13271-000728-1, "Cap Ceramic 100nF 25V X5R ±10% SMD 0402 +85°C Paper T/R", Capacitance=0.1uF, Case Code (Imperial)=0402, Case Code (Metric)=1005, Dielectric=X5R, Max Operating Temperature=85°C, Min Operating Temperature=-55°C, Package Quantity=1, Tolerance=10%, Voltage=25V, Case/Package=0402, Depth=0.5mm, Height=0.5mm, Lead Free="Lead Free", Length=1mm, Mount="Surface Mount", Packaging="Tape and Reel", Radiation Hardening=No, Thickness=0.022inch, Voltage Rating=25V, Voltage Rating (DC)=25V, Width=0.02inch
C2 C5 C6 C9 C11 C12 C16 C19 C20 C24 C26 C27 C37 C39 C42: library part CMP-13271-001936-1, "Cap Ceramic 1uF 10V X5R ±10% SMD 0402 +85°C Paper T/R", Capacitance=1uF, Case Code (Imperial)=0402, Case Code (Metric)=1005, Dielectric=X5R, Max Operating Temperature=85°C, Min Operating Temperature=-55°C, Package Quantity=1, Tolerance=10%, Voltage Rating=10V, Case/Package=0402, Contact Plating=Tin, Depth=0.5mm, Height=0.5mm, Length=1mm, Material=Ceramic, Mount="Surface Mount", Packaging="Tape and Reel", Radiation Hardening=No, Thickness=0.022inch, Width=0.02inch
C8 C23 C31: library part CMP-13271-002778-1, "Cap Ceramic 10uF 10V X5R ±20% SMD 0402 +85°C Paper T/R", Capacitance=10uF, Case Code (Imperial)=0402, Case Code (Metric)=1005, Max Operating Temperature=85°C, Min Operating Temperature=-55°C, Tolerance=20%, Voltage Rating=10V, Case/Package=0402, Length=0.039inch, Mount="Surface Mount", Packaging="Tape and Reel", Thickness=0.035inch, Width=0.02inch
C13 C28: library part CMP-2008-02699-2, "General Purpose Ceramic Capacitor, 0402, 1nF, 10%, X7R, 15%, 50V", Capacitance=1nF, Case Code (Imperial)=0402, Case Code (Metric)=1005, Dielectric=X7R, Insulation Resistance=100GR, Max Operating Temperature=125°C, Min Operating Temperature=-55°C, Package Quantity=1, Tolerance=10%, Voltage=50V, Case/Package=0402, Construction=Flat, Contact Plating=Tin, Depth=0.5mm, Dissipation Factor=2.5%, Height=0.56mm, Lead Free="Lead Free", Length=1mm, Mount="Surface Mount", Number of Pins=2, Packaging="Tape and Reel", Radiation Hardening=No, REACH SVHC="No SVHC", RoHS Compliant=Yes, Series=-, Termination=SMD/SMT, Thickness=0.022inch, Voltage Rating=50V, Voltage Rating (DC)=50V, Width=0.02inch
C14 C29: library part CMP-13271-000286-1, "Cap Ceramic 22uF 6.3V X5R ±20% SMD 0402 +85°C Paper T/R", Capacitance=22uF, Case Code (Imperial)=0402, Case Code (Metric)=1005, Max Operating Temperature=85°C, Min Operating Temperature=-55°C, Tolerance=20%, Voltage Rating=6.3V, Case/Package=0402, Length=0.039inch, Mount="Surface Mount", Packaging="Tape and Reel", Thickness=0.022inch, Width=0.02inch
C21: library part CMP-2008-04642-1, Capacitance=1.5nF, Manufacturer=Murata, Part Number=GRM155R71H152KA01D
C30: library part CMP-08246-000497-1, "Cap Ceramic 10nF 35V X7R 10% Pad SMD 0402 +125°C Automotive T/R", Capacitance=10nF, Case Code (Imperial)=0402, Case Code (Metric)=1005, Dielectric=X7R, Max Operating Temperature=125°C, Min Operating Temperature=-55°C, Tolerance=10%, Voltage Rating=35V, Case/Package=0402, Lead Free="Lead Free", Packaging="Tape and Reel", Termination=SMD/SMT, Voltage Rating (DC)=35V
C35: library part CMP-06035-048202-1, "Chip Multilayer Ceramic Capacitors for General Purpose, 0402, 2.2uF, X7R, 15%, 10%, 10V", Capacitance=2.2uF
C36 C38: library part CMP-13271-000548-1, "Cap Ceramic 4.7uF 10V X5R ±20% SMD 0402 +85°C Paper T/R", Capacitance=4.7uF, Case Code (Imperial)=0402, Case Code (Metric)=1005, Dielectric=X5R, Max Operating Temperature=85°C, Min Operating Temperature=-55°C, Package Quantity=10000, Tolerance=20%, Voltage Rating=10V, Case/Package=0402, Lead Free="Lead Free", Length=0.039inch, Mount="Surface Mount", Packaging="Tape and Reel", Thickness=0.022inch, Width=0.02inch
J1 J2 J7 J8 J9 J10 J11 J12 J13 J14 J15 J16 J17 J18 J19 J20 J21 J22 J23 J25: "Connector", Manufacturer_Name=Hirose, Manufacturer_Part_Number=DF52-2S-0.8H(21), Mouser Part Number=798-DF52-2S-0.8H21, Datasheet Link=https://datasheet.datasheetarchive.com/originals/distributors/DKDS-30/591726.pdf, Height=1mm, Mouser Price/Stock=https://www.mouser.co.uk/ProductDetail/Hirose-Connector/DF52-2S-0.8H21?qs=%2FKR40Cd6GUpAHUMGMtWbig%3D%3D
J3: library part DF40HC(3.0)-40DS-0.4V(51), "40 Position 0.4mm Pitch Dual Row Vertical Surface Mount (SMT) Pin Socket, 2.5mm Stacking Height", Package=None, Availability=Unavailable, MP=DF40HC(3.0)-40DS-0.4V(51), Price=None, System=Connector
J4: library part DF40HC(3.0)-50DS-0.4V(51), "50 Position 0.4mm Pitch Dual Row Vertical Surface Mount (SMT) Pin Socket, 2.5mm Stacking Height", Mfr_Name=Hirose, Copyright="Copyright (C) 2023 Ultra Librarian. All rights reserved.", Manufacturer_Part_Number=DF40HC(3.0)-50DS-0.4V(51), RefDes=RefDes, Type=DEV
J5: "50 Position 0.4mm Pitch Dual Row Vertical Surface Mount (SMT) Receptacle", Current Rating=300mA, Max Operating Temperature=85°C, Min Operating Temperature=-35°C, Package Quantity=1, Voltage Rating=30V, Connector Type=Plug, Contact Material=Bronze, Contact Plating=Gold, Gender=Male, Housing Material=Polymer, Lead Free="Lead Free", Mated Stacking Heights=4mm, Mount="Surface Mount", Number of Contacts=40, Number of Positions=40, Number of Rows=2, Orientation=Straight, Packaging="Tape and Reel", Pitch=0.4mm, REACH SVHC="No SVHC", System=Connector, Termination=SMD/SMT
J6: "50 Position 0.4mm Pitch Dual Row Vertical Surface Mount (SMT) Receptacle,", Mfr_Name=Hirose, Copyright="Copyright (C) 2023 Ultra Librarian. All rights reserved.", Manufacturer_Part_Number=DF40C-50DP-0.4V(51), RefDes=RefDes, System=Connector, Type=DEV
J24: "Connector", Manufacturer_Name=Molex, Manufacturer_Part_Number=505070-4022, Mouser Part Number=538-505070-4022, Datasheet Link=https://componentsearchengine.com/Datasheets/1/505070-4022.pdf, Height=0.53mm, Mouser Price/Stock=https://www.mouser.co.uk/ProductDetail/Molex/505070-4022?qs=byeeYqUIh0Nt60HVGOVJPw%3D%3D
Q1: "PNP Switching Transistor", ComponentLink1Description="Manufacturer Link", ComponentLink1URL=http://www.semiconductors.philips.com/, ComponentLink2Description=Datasheet, ComponentLink2URL=http://www.semiconductors.philips.com/acrobat/datasheets/PMSS3906_4.pdf, DatasheetVersion=22-Apr-1999, LatestRevisionDate=12-Dec-2006, LatestRevisionNote="IPC-7351 Footprint Added.", PackageDescription="3-Pin SOT-323 Package 0.65 mm Pitch, 2.1 mm Lead Span", PackageReference=SOT323, PackageVersion=Apr-1999, Published=17-Sep-2003, Publisher="Altium Limited"
R1: library part CMP-02407-000443-1, "RES SMD 1M OHM 1% 1/10W 0402", Case Code (Imperial)=0402, Case Code (Metric)=1005, Max Operating Temperature=125°C, Max Power Dissipation=100mW, Min Operating Temperature=-55°C, Package Quantity=1, Power Rating=63mW, Resistance=1MR, Temperature Coefficient=50ppm/°C, Tolerance=1%, Voltage Rating=50V, Case/Package=0402, Composition="Thin Film", Contact Plating=Tin, Depth=0.5mm, Height=0.015inch, Lead Free="Lead Free", Length=1mm, Military Standard=Not, Mount="Surface Mount", Number of Terminations=2, Packaging="Tape and Reel", Radiation Hardening=No, REACH SVHC="No SVHC", Voltage Rating (DC)=50V, Weight=2.1E-05oz, Width=0.5mm
R2: library part CMP-03412-018483-1, "RES 45.3K OHM 1/16W .1% SMD 0402", Manufacturer=Yageo, Package=RT0402, Power Rating=0.063W, Resistance=45.3KΩ, Temperature="-55°C to +155°C", Temperature Coefficient="25 ppm/°C", Temperature Range High=+155°C, Temperature Range Low=-55°C, Tolerance=0.001, Voltage Rating=50V, Automotive=No, Category=Res, ComponentLink2Description=Datasheet, ComponentLink2URL=http://www.yageo.com/documents/recent/PYu-RT_1-to-0.01_RoHS_L_9.pdf, Composition="Thin Film", Device Class L1="Passive Components", Device Class L2=Resistors, Device Class L3="Chip SMD Resistors", Digikey Description="RES 45.3K OHM 1/16W .1% SMD 0402", Footprint Url=http://www.yageo.com/exep/pages/download/literatures/PYu-R_Mount_10.pdf, Height=0.35mm, Ipc Land Pattern Name=RESC10050X30, Lead Free=Yes, Manufacturer Part Number=RT0402BRD0745K3L, Mouser Description="Thin Film Resistors 1/16W 45.3K ohm .1% 25ppm", Octopart=https://octopart.com/rt0402brd0745k3l-yageo-1472491, RoHS=TRUE, Series=RT
R3: library part CMP-04015-050624-1, "200kΩ ±0.1% 0.063W, 1/16W Chip Resistor 0402 (1005 Metric) Moisture Resistant Thin Film", Resistance=200k
R4 R9 R10 R11 R12 R13 R14 R32 R33 R34 R35 R36: library part CMP-2002-07342-2, "RES SMD 0 OHM JUMPER 1/16W 0402", Case Code (Imperial)=0402, Case Code (Metric)=1005, Max Operating Temperature=155°C, Max Power Dissipation=63mW, Min Operating Temperature=-55°C, Power Rating=62.5mW, Resistance=0R, Resistor Type="Thick Film", Temperature Coefficient=200ppm/°C, Tolerance=1%, Voltage Rating=50V, Case/Package=0402, Contact Plating=Tin, Features="Moisture Resistant", Height=0.35mm, Lead Free="Lead Free", Length=1mm, Mount="Surface Mount", Number of Terminations=2, Packaging="Tape and Reel", Radiation Hardening=No, RoHS Compliant=Yes, Series=RC, Size Code=0402, Termination=SMD/SMT, Width=0.5mm
R5 R6 R7 R15 R16 R17 R18 R19 R20 R21 R22 R23 R24 R25 R26 R27 R28 R29 R30 R31: library part CMP-2002-02901-2, "RES 4.70K OHM 1/16W 1% SMD 0402", Manufacturer=Yageo, Package=RT0402, Power Rating=0.063W, Resistance=4.7KΩ, Temperature="-55°C to +155°C", Temperature Coefficient="50 ppm/°C", Temperature Range High=+155°C, Temperature Range Low=-55°C, Tolerance=0.01, Voltage Rating=50V, Automotive=No, Category=Res, ComponentLink2Description=Datasheet, ComponentLink2URL=http://www.yageo.com/documents/recent/PYu-RT_1-to-0.01_RoHS_L_9.pdf, Composition="Thin Film", Device Class L1="Passive Components", Device Class L2=Resistors, Device Class L3="Chip SMD Resistors", Digikey Description="RES 4.70K OHM 1/16W 1% SMD 0402", Footprint Url=http://www.yageo.com/exep/pages/download/literatures/PYu-R_Mount_10.pdf, Height=0.35mm, Ipc Land Pattern Name=RESC10050X30, Lead Free=Yes, Manufacturer Part Number=RT0402FRE074K7L, Mouser Description="Res Thin Film 0402 4.7K Ohm 1% 1/16W ±50ppm/°C SMD Paper T/R", Octopart=https://octopart.com/rt0402fre074k7l-yageo-1371922, RoHS=TRUE, Series=RT
R8: library part CMP-2002-01632-2, "56kΩ ±0.5% 0.0625W 1/16W Chip Resistor 0402 (1005 Metric) Thin Film", Case Code (Imperial)=0402, Case Code (Metric)=1005, Max Operating Temperature=125°C, Max Power Dissipation=63mW, Min Operating Temperature=-55°C, Power Rating=62.5mW, Resistance=56k, Resistance Tolerance=0.5%, Resistor Type="Thin Film", Temperature Coefficient=25ppm/°C, Voltage Rating=25V, Case/Package=0402, Lead Free="Lead Free", Number of Pins=2, Number of Terminations=2, Packaging="Tape and Reel", RoHS Compliant=Yes, Series=RR, Size Code=0402, Termination=SMD/SMT, Tolerance=0.5%, Voltage Rating (DC)=25V
U1 U2: library part CMP-0003-00996-1, "8-Channel, 24-Bit ADC with Integrated Respiration Impedance and ECG Front End, -40 to 85 degC, 64-pin BGA (ZXG64), Green (RoHS & no Sb/Br)", Analog Voltage AV/DD(Max)(V)=5.25, Analog Voltage AV/DD(Min)(V)=2.7, Manufacturer="Texas Instruments", # Input Channels=8, Architecture=Delta-Sigma, ComponentLink1Description="Manufacturer URL", ComponentLink1URL=http://www.ti.com/, ComponentLink2Description=Datasheet, ComponentLink2URL=http://www.ti.com/general/docs/lit/getliterature.tsp?genericPartNumber=ADS1298R&fileType=pdf, ComponentLink3Description="Package Specification", ComponentLink3URL=http://www.ti.com/litv/pdf/mpbg581, DatasheetVersion=SBAS459I, Digital Supply(Max)(V)=3.6, Digital Supply(Min)(V)=1.65, Eco-Plan="Green (RoHS & no Sb/Br)", Interface="Serial SPI", Mounting Technology="Surface Mount", PackageDescription="64-Pin Plastic Ball Grid Array, Body 8 x 8 mm, Pitch 0.8 mm", PackageReference=ZXG64, PackageVersion="4206838/A, 02/2005", PartNumber=ADS1298RIZXGT, Resolution(Bits)=24, Sample Rate (max)(SPS)=32K, SNR(dB)=112, SubFamily="Precision ADC (<=10MSPS)"
U3: library part CMP-13559-000004-1, "IC VREF SERIES 0.3% SOT23-3", Case/Package=TO-236-3, Max Operating Temperature=85°C, Min Operating Temperature=-40°C, Min Output Voltage=2.048V, Operating Supply Current=1.5uA, Output Current=7mA, Temperature Coefficient=50ppm/°C, Tolerance=0.3%, Mount="Surface Mount", Output Type=Fixed, Packaging="Tape and Reel", Reference Type=Series, RoHS Compliant=Yes
U4: library part CMP-04918-000089-1, "IC REG CHARGE PUMP ADJ 8WSON", Ambient Temperature Range High=+85°C, Ambient Temperature Range Low=-40°C, Manufacturer="Texas Instruments", Max Junction Temp=+125°C, Max Supply Voltage=5.5V, Min Supply Voltage=2.7V, Negative Voltage Available=true, Nominal Supply Current=370uA, Output Current=250mA, Output Voltage=-5-1.5V, Package=DSG0008A, Switching Frequency=2MHz, Temperature="-40°C to +85°C", Automotive=No, Category=IC, ComponentLink2Description=Datasheet, ComponentLink2URL=http://www.ti.com/lit/ds/symlink/lm27761.pdf, Device Class L1="Integrated Circuits (ICs)", Device Class L2="Power Management ICs", Device Class L3="Voltage Regulators - Switching", Digikey Description="IC REG CHARGE PUMP ADJ 8WSON", Height=0.8mm, Lead Free=Yes, Manufacturer Part Number=LM27761DSGT, Mouser Description="Switching Voltage Regulators Low-Noise Regulated Switched Capacitor", Number of Outputs=1, Octopart=https://octopart.com/lm27761dsgt-texas+instruments-66646294, Output Type=AdjustableProgrammable, RoHS=TRUE, Standoff Height=0mm, Switching Topology="Charge Pump", Temperature Range High=+85°C, Temperature Range Low=-40°C
U6: "Integrated Circuit", Manufacturer_Name="Texas Instruments", Mouser Part Number=595-TPS22916CYFPR, Arrow Part Number=TPS22916CYFPR, Arrow Price/Stock=https://www.arrow.com/en/products/tps22916cyfpr/texas-instruments?region=nac, Datasheet Link=http://www.ti.com/lit/gpn/tps22916, Height=0.5mm, Manufacturer_Part_Number=TPS22916CYFPR, Mouser Price/Stock=https://www.mouser.co.uk/ProductDetail/Texas-Instruments/TPS22916CYFPR?qs=EU6FO9ffTweddKR4NsfVQg%3D%3D
Y1: library part CMP-25159-259502-1, "MEMS OSC 2.048MHZ LVCMOS", Frequency=2.048MHz, Frequency Stability=50ppm, Max Operating Temperature=85°C, Min Operating Temperature=-40°C, Height=0.024inch, Length=0.061inch, Mount="Surface Mount", Packaging="Cut Tape", RoHS Compliant=Yes, Series=SiT8021, Width=0.033inch

## Via types
v1: diameter 0.25, hole 0.15, Top Layer to Bottom Layer, tented both sides, 308 vias
v2: diameter 0.25, hole 0.15, Top Layer to SIG1, tented both sides, 72 vias
v3: diameter 0.25, hole 0.15, SIG2 to Bottom Layer, tented both sides, 46 vias
v4: diameter 0.25, hole 0.15, Top Layer to GND/PWR1, tented both sides, 3 vias
v5: diameter 0.25, hole 0.15, Top Layer to Bottom Layer, 2 vias
v6: diameter 0.25, hole 0.15, GND/PWR2 to Bottom Layer, tented both sides, 1 vias

## Nets (pads, with @x,y where several pads share a name; then routed paths per layer and width w, separated by ;. In a path a pad name is that pad's centre, name@x,y a point inside that pad or via, vN(x,y) a via of type N, cw(c..) or ccw(c..) an arc to the next point about the centre after c; other vN are vias at no path point)
1V8: C39.1 J4.6 J4.7 J6.6 J6.7 U6.A2 | length 17.1
  Top Layer w0.18: v1(8.25,4.05) 7.455,4.05 7.35,3.945 7.35,3.755 7.455,3.65 v1(7.85,3.65) J4.6@8.275,3.65
  SIG1 w0.7: 8.6,0.65 8.65,0.6 16.3,0.6 v1(16.425,0.725)
  SIG1 w0.8: v1(7.85,3.65) 7.766,3.65 7.225,3.109 7.225,1.7 8.275,0.65 8.6,0.65 ; v1@16.35,0.65 v1(16.425,0.725)
  Bottom Layer w0.18: J6.6@8.055,3.65 7.455,3.65 7.35,3.755 7.35,3.925 7.475,4.05 v1(8.25,4.05)
  Bottom Layer w0.2: 16.425,1.35 16.425,1.518 16.6,1.693 U6.A2@16.6,1.7
  Bottom Layer w0.4: C39.1@16.421,0.7 16.425,0.704 v1(16.425,0.725) 16.425,1.35
-1.5V: C35.1 R2.2 R13.2 U4.4 | length 8.5
  Top Layer w0.25: U4.4@12.947,1.125 12.947,1 13.172,0.775 13.175,0.775
  Top Layer w0.3: R2.2@15.022,2.95 15.022,2.9 15.122,2.8 15.375,2.8 15.7,2.475 15.7,1.575
  Top Layer w0.4: 13.175,0.775 14.021,0.775 14.15,0.646 C35.1@14.15,0.625
  Top Layer w0.7: C35.1@14.15,0.625 14.152,0.627 14.752,0.627 15.7,1.575 17.253,1.575 17.839,0.989 18.71,0.989 18.718,0.981 R13.2@18.718,0.975
A_IN1N: J18.1 J24.11 J24.12 J24.15 J24.16 J24.19 J24.20 J24.23 J24.24 J24.27 J24.28 J24.31 J24.32 J24.35 J24.36 J24.39 J24.40 R10.1 R31.1 U1.A2 U1.B2 U1.C2 U1.D2 U1.E2 U1.F2 U1.G2 U1.H2 U2.A2 U2.B2 U2.C2 U2.D2 U2.E2 U2.F2 U2.G2 U2.H2 | length 172.1
  Top Layer w0.1: R10.1@7.543,13.375 7.543,13.777 9.64,15.875 10.255,15.875 10.298,15.917 10.418,15.917 10.46,15.918 10.518,15.976 10.799,16.342 10.799,16.407 10.843,16.513 10.888,16.559 10.888,17.041 10.843,17.087 10.799,17.193 10.799,17.258 10.775,17.281 10.775,17.872 10.825,18.064 11.319,18.558 12.4,18.558 13.467,19.625 v2(13.85,19.625) ; v1(11.144,15.175) 11.172,15.203 11.172,15.58 11.188,15.595 11.172,15.611 11.24,15.679 11.24,17.29 ; J24.40@11.2,13.825 11.2,12.75 12.3,11.65 12.3,10.675 U1.H2@11.95,10.325 ; v1@11.25,17.3 11.24,17.29 ; v1(11.25,17.425) 11.24,17.415 11.24,17.29 ; v1(11.575,14.35) 11.575,14.389 11.75,14.564 11.75,15.254 11.79,15.294 11.79,15.376 11.9,15.486 11.9,16.032 11.825,16.107 11.825,16.861 11.946,16.982 11.946,17.221 v1(11.975,17.25) ; J24.36@11.9,13.825 v2(11.9,13) 11.9,12.799 13.1,11.599 13.1,10.675 U1.G2@12.75,10.325 ; v1(12.056,15.042) 12.097,15.042 12.256,15.201 12.357,15.201 12.49,15.334 12.49,15.376 12.6,15.486 J24.31@12.6,15.639 12.6,17.593 v1(12.628,17.622) ; J24.32@12.6,13.825 v2(12.6,13) 12.6,12.844 13.9,11.544 13.9,10.675 U1.F2@13.55,10.325 ; v1(13.043,14.625) 13.015,14.654 13.015,14.735 13,14.75 13,15.039 13.278,15.317 13.278,15.617 J24.27@13.3,15.639 13.3,16.839 13.218,16.921 13.218,17.135 v1(13.193,17.161) ; J24.28@13.3,13.825 v2(13.3,13.075) 13.3,12.95 14.7,11.55 14.7,10.675 U1.E2@14.35,10.325 ; v1(13.961,15.925) v1@13.975,15.925 ; J24.24@14,13.825 14,13.056 15.5,11.556 15.5,10.675 U1.D2@15.15,10.325 ; J24.23@14,15.639 13.988,15.652 13.988,15.913 v1@13.975,15.925 ; v1(14,17.125) 13.988,17.113 13.988,15.937 v1@13.975,15.925 ; v1(14.225,14.35) 14.266,14.35 14.331,14.416 14.398,14.416 14.7,14.718 J24.19@14.7,15.639 14.66,15.679 14.66,16.001 14.6,16.061 14.6,16.735 14.696,16.831 14.696,17.031 v1(14.725,17.06) ; J24.20@14.7,13.825 14.713,13.812 14.713,13.137 v2(14.725,13.125) 14.725,13.084 14.875,12.934 14.875,12.928 16.3,11.503 16.3,10.675 U1.C2@15.95,10.325 ; v2(14.7,20.8) 14.7,21.225 15.575,22.1 15.778,22.1 16.478,22.8 19.725,22.8 v2(20.425,22.1) 22,22.1 23.275,20.825 J18.1@23.275,18.335 ; v1(15.331,16) 15.353,16 15.399,15.955 15.399,15.64 J24.15@15.4,15.639 ; v1@15.398,15.998 15.398,16.279 15.55,16.431 v1(15.55,17.1) ; J24.16@15.4,13.825 v2(15.4,13.15) 15.4,13.05 17.1,11.35 17.1,10.675 U1.B2@16.75,10.325 ; v2(16.075,14.125) 16.087,14.113 16.087,13.838 J24.12@16.1,13.825 16.069,13.794 16.069,13.101 17.9,11.27 17.9,10.675 U1.A2@17.55,10.325 ; v1(16.175,15.2) 16.175,15.241 16.139,15.276 16.139,15.6 J24.11@16.1,15.639 16.14,15.679 16.14,15.994 16.775,16.629 16.775,17.1 v1(16.5,17.375) ; R31.1@20.4,23.7 20.4,22.922 v2(20.425,22.897)
  SIG1 w0.1: v2(11.2,13) 11.2,13.504 10.75,13.954 10.75,15.725 11.125,16.1 11.125,17.259 11.25,17.384 v1(11.25,17.425) ; v2(11.9,13) 11.9,13.55 12.075,13.725 12.075,14.634 11.781,14.928 11.781,15.058 11.725,15.114 11.725,15.672 11.808,15.754 11.808,16.822 11.7,16.93 11.7,17.2 11.721,17.221 11.946,17.221 v1(11.975,17.25) ; v2(12.6,13) 12.6,13.647 12.45,13.797 12.45,14.475 12.532,14.557 12.532,15.396 12.7,15.564 12.7,16.121 12.45,16.371 12.45,17.411 12.628,17.589 v1(12.628,17.622) ; v1(13.193,17.161) 13.152,17.161 13.038,17.275 12.918,17.275 12.918,16.398 13.078,16.238 13.078,15.344 13.493,14.929 13.493,14.341 13.475,14.323 13.475,13.715 13.3,13.54 v2(13.3,13.075) ; v2(14,13.139) 14,14.186 13.921,14.265 13.921,14.923 13.921,15.229 14.225,15.533 14.225,15.8 14.236,15.811 14.236,16.039 14.225,16.05 14.225,16.064 13.964,16.325 13.964,16.764 14,16.8 v1(14,17.125) ; v2(14.7,20.8) 14.125,20.225 14.125,19.9 v2(13.85,19.625) 14.175,19.3 14.175,19.072 14.95,18.297 14.95,17.225 ; v2(14.725,13.125) 14.725,13.91 15,14.185 15,15.636 14.675,15.961 14.675,15.986 14.6,16.061 14.6,16.375 15.075,16.85 15.075,17.1 14.95,17.225 ; v1(14.725,17.06) 14.766,17.06 14.931,17.225 14.95,17.225 ; v2(15.4,13.15) 15.4,13.828 15.35,13.878 15.35,15.314 15.969,15.933 15.969,16.981 15.85,17.1 v1(15.55,17.1) ; v2(16.075,14.125) 16.075,14.165 15.7,14.54 15.7,15.166 16.525,15.991 16.525,17.35 v1(16.5,17.375) ; v2@20.425,22.1 v2(20.425,22.897)
  SIG2 w0.1: v1(11.144,15.175) 10.75,14.781 10.75,13.055 11.075,12.73 11.075,11.3 11.85,10.525 v3(11.875,10.525) ; v1(11.575,14.35) 11.575,14.316 11.475,14.216 11.475,13.101 12.6,11.976 v3(12.6,10.575) ; v1(12.056,15.042) 12.056,14.748 12.025,14.717 12.025,13.273 13.35,11.948 v3(13.35,10.575) ; v1(13.043,14.625) 13.043,13.783 13,13.74 13,12.938 14.2,11.738 v3(14.2,10.575) ; v1(13.961,15.925) 13.975,15.911 13.975,15.53 14.035,15.47 14.035,15.038 13.55,14.553 13.55,13.27 15.025,11.795 v3(15.025,10.575) ; v1(14.225,14.35) 14.225,13.3 15.75,11.775 v3(15.75,10.575) ; v1(15.331,16) 15.36,15.972 15.36,15.878 15.369,15.869 15.353,15.853 15.353,12.819 16.575,11.597 v3(16.575,10.575) ; v1(16.175,15.2) 16.175,14.88 16.311,14.744 16.311,14.525 16.3,14.514 16.3,14.467 16.25,14.417 16.25,12.7 17.4,11.55 v3(17.4,10.575)
  Bottom Layer w0.1: v1(11.25,17.425) 11.761,17.425 11.936,17.25 v1(11.975,17.25) 12.004,17.279 12.285,17.279 v1(12.628,17.622) 12.849,17.401 12.952,17.401 v1(13.193,17.161) 13.211,17.143 13.982,17.143 v1(14,17.125) 14.619,17.125 14.684,17.06 v1(14.725,17.06) 14.745,17.08 15.53,17.08 v1(15.55,17.1) 15.825,17.375 v1(16.5,17.375) ; U2.A2@11.4,10.1 11.459,10.1 11.459,10.134 11.85,10.525 v3(11.875,10.525) ; U2.B2@12.2,10.1 12.2,10.137 12.6,10.537 v3(12.6,10.575) ; U2.C2@13,10.1 13.321,10.421 13.321,10.546 v3(13.35,10.575) ; U2.D2@13.8,10.1 13.8,10.137 14.2,10.537 v3(14.2,10.575) ; U2.E2@14.6,10.1 14.6,10.125 15.025,10.55 v3(15.025,10.575) ; U2.F2@15.4,10.1 15.721,10.421 15.721,10.546 v3(15.75,10.575) ; U2.G2@16.2,10.1 16.2,10.159 16.575,10.534 v3(16.575,10.575) ; U2.H2@17,10.1 17,10.137 17.4,10.537 v3(17.4,10.575)
A_IN1P: J17.1 J24.42 R21.1 U1.H1 | length 18.2
  Top Layer w0.1: J17.1@6.075,24.68 6.225,24.53 6.225,24.084 6.359,23.95 6.6,23.95 6.8,23.75 R21.1@6.8,23.7 6.672,23.572 v2(6.672,21.818) ; J24.42@10.85,13.825 v2(10.85,13.425) 10.85,12.775 11.95,11.675 U1.H1@11.95,11.125
  SIG1 w0.1: v2(6.672,21.818) 6.675,21.815 6.675,19.225 7.9,18 10.056,18 10.931,17.125 10.95,17.125 10.95,16.175 10.575,15.8 10.575,13.881 10.7,13.756 10.7,13.616 10.85,13.466 v2(10.85,13.425)
A_IN2P: J15.1 J24.38 R17.1 U1.G1 | length 17.3
  Top Layer w0.1: v2(9.1,22.531) 9.295,22.725 10.275,22.725 10.5,22.95 R17.1@10.5,23.7 10.375,23.825 J15.1@10.375,24.68 ; J24.38@11.55,13.825 v2(11.55,13.425) 11.55,12.866 12.75,11.666 U1.G1@12.75,11.125
  SIG1 w0.1: v2(9.1,22.531) 9.1,21.639 9,21.539 9,20.45 11.525,17.925 11.525,16.25 11.258,15.982 11.258,15.658 11.419,15.496 11.419,15.172 11.606,14.985 11.606,14.856 11.9,14.562 11.9,13.797 11.55,13.447 v2(11.55,13.425)
A_IN3P: J16.1 J24.34 R28.1 U1.F1 | length 15.9
  Top Layer w0.1: J24.34@12.25,13.825 v2(12.25,13.45) 12.25,12.911 13.55,11.611 U1.F1@13.55,11.125 ; v2(13.404,21.575) 13.404,21.604 14.3,22.5 R28.1@14.3,23.7 14.3,23.75 14.5,23.95 14.55,23.95 14.675,24.075 J16.1@14.675,24.68
  SIG1 w0.1: v2(12.25,13.45) 12.25,14.522 12.35,14.622 12.35,15.461 12.525,15.636 12.525,16.048 12.275,16.298 12.275,17.189 12.25,17.214 12.25,17.364 12.025,17.589 12.025,20.196 v2(13.404,21.575)
A_IN4P: J14.1 J24.30 R29.1 U1.E1 | length 19.9
  Top Layer w0.1: J24.30@12.95,13.825 v2(12.95,13.45) 12.95,13.017 14.35,11.617 U1.E1@14.35,11.125 ; v2@13.825,21.4 13.866,21.4 13.923,21.457 13.957,21.457 15.65,23.15 18.75,23.15 19.05,23.45 19.1,23.45 19.3,23.65 R29.1@19.3,23.7 19.3,23.75 19.1,23.95 19.055,23.95 18.975,24.03 J14.1@18.975,24.68
  SIG1 w0.1: v2(12.95,13.45) 13.3,13.8 13.3,14.395 13.318,14.413 13.318,14.857 12.875,15.3 12.875,16.193 12.743,16.326 12.743,17.347 12.903,17.508 12.903,18.536 12.625,18.814 12.625,20.2 v2@13.825,21.4
  other v2: 13.824,21.401
A_IN5P: J13.1 J24.26 R30.1 U1.D1 | length 23.9
  Top Layer w0.1: J24.26@13.65,13.825 v2(13.65,13.466) 13.625,13.441 13.625,13.1 15.15,11.575 U1.D1@15.15,11.125 ; v2(14.143,20.957) 14.162,20.976 14.162,21.282 15.855,22.975 19.797,22.975 20.15,22.622 23.014,22.622 23.425,23.034 23.425,23.525 R30.1@23.6,23.7 23.6,23.75 23.4,23.95 23.355,23.95 23.275,24.03 J13.1@23.275,24.68
  SIG1 w0.1: v2(13.65,13.466) 13.65,14.25 13.668,14.268 13.668,15.104 13.34,15.433 13.34,16.29 13.468,16.417 13.468,18.275 13.4,18.343 13.4,20.2 14.143,20.943 v2(14.143,20.957)
A_IN6P: J22.1 J24.22 R18.1 U1.C1 | length 26.7
  Top Layer w0.1: R18.1@5,23.675 5,22.35 6.075,21.275 6.075,21.225 ; J22.1@6.075,18.335 6.075,21.225 ; v2(9.275,21.425) 9.25,21.45 6.3,21.45 6.075,21.225 ; J24.22@14.35,13.825 v2(14.35,13.475) 14.35,13.025 15.95,11.425 U1.C1@15.95,11.125
  SIG1 w0.1: v2(9.275,21.425) 9.275,21.46 9.452,21.637 9.452,21.702 9.6,21.85 13.825,21.85 14.425,21.25 14.425,20.85 13.575,20 13.575,19.425 14.425,18.575 14.425,15.989 14.5,15.914 14.5,14.04 14.35,13.89 v2(14.35,13.475)
A_IN7P: J21.1 J24.18 R22.1 U1.B1 | length 23.4
  Top Layer w0.1: R22.1@8.6,23.7 8.6,22.489 9.55,21.539 9.55,21.35 10.375,20.525 ; J21.1@10.375,18.335 10.375,20.525 ; v2(14.4,19.875) 14.375,19.875 13.299,20.951 13.299,21.043 12.192,22.15 11.275,22.15 10.375,21.25 10.375,20.525 ; J24.18@15.05,13.825 v2(15.05,13.466) 15.05,13 16.693,11.357 16.693,11.182 U1.B1@16.75,11.125
  SIG1 w0.1: v2(14.4,19.875) 14.4,19.579 14.371,19.55 14.371,19.432 14.35,19.411 14.35,19.25 14.6,19 15.35,19 15.425,18.925 15.425,17.364 15.275,17.214 15.275,16.681 15.606,16.35 15.606,15.886 15.425,15.705 15.425,15.636 15.175,15.386 15.175,14.112 15.05,13.987 v2(15.05,13.466)
A_IN8P: J20.1 J24.14 R25.1 U1.A1 | length 17
  Top Layer w0.1: R25.1@12.8,23.7 12.8,21.79 13.7,20.889 13.759,20.889 13.844,20.803 13.86,20.803 14.675,19.989 v2(14.675,19.325) J20.1@14.675,18.335 ; J24.14@15.75,13.825 15.75,12.947 17.55,11.147 U1.A1@17.55,11.125
  SIG1 w0.1: v2(14.675,19.325) 14.7,19.3 15.85,19.3 16.2,18.95 16.2,15.914 15.525,15.239 15.525,13.95 15.583,13.892 15.583,13.808 15.75,13.641 v2(15.75,13.6)
A_VCAP1: C14.1 U1.H5 | length 1.9
  Top Layer w0.4: C14.1@10.142,7.819 10.158,7.835 10.978,7.835 11.089,7.945 11.93,7.945 U1.H5@11.95,7.925
A_VCAP2: C9.1 U1.H6 | length 2.1
  Top Layer w0.4: C9.1@10.206,6.275 10.228,6.298 10.398,6.298 11.195,7.095 11.92,7.095 U1.H6@11.95,7.125
A_VCAP3: C10.1 C11.1 U1.B7 | length 4.8
  Top Layer w0.2: U1.B7@16.75,6.325 17.125,5.95 17.359,5.95 17.384,5.925 17.716,5.925 17.719,5.929 17.946,5.929
  Top Layer w0.4: 17.946,5.929 17.95,5.925 18.027,5.925 18.931,5.021 18.931,4.301 19.014,4.218 19.014,3.865 C10.1@19.05,3.829 19.05,3.85 19.086,3.886 19.729,3.886 19.775,3.932 C11.1@19.775,3.954
A_VCAP4: C12.1 U1.G3 | length 3.3
  Top Layer w0.2: 11.486,10.114 11.675,9.925 12.35,9.925 U1.G3@12.75,9.525
  Top Layer w0.4: C12.1@10.142,10.69 10.178,10.654 10.178,10.632 10.278,10.533 10.278,10.41 10.688,10 11.268,10 11.382,10.114 11.486,10.114
A_VREFP: C7.1 C8.1 U1.H3 | length 2.6
  Top Layer w0.4: C8.1@9.417,9.572 9.417,9.561 9.453,9.525 U1.H3@11.95,9.525
A_WCT: C13.1 U1.D3 | length 5.7
  Top Layer w0.2: U1.D3@15.15,9.525 15.188,9.563 15.365,9.563 15.402,9.6 v2(15.415,9.6) ; v2(17.95,11.85) 18.494,12.394 19.278,12.394 C13.1@19.484,12.6
  SIG1 w0.2: v2(15.415,9.6) 15.425,9.61 15.425,9.833 15.717,10.125 16.225,10.125 v2(17.95,11.85)
ADS_A_DR: J4.22 J6.22 U1.D6 | length 11.6
  Top Layer w0.1: J4.22@8.275,10.05 8.301,10.024 8.918,10.024 8.95,9.991 8.95,9.829 8.991,9.788 8.991,8.273 9.298,7.966 9.583,7.966 9.844,8.226 10.284,8.226 11.208,9.15 15.22,9.15 15.5,8.87 15.5,7.475 U1.D6@15.15,7.125
  other v1: 7.85,10.05
ADS_B_DR: J4.23 J6.23 U2.D6 | length 8.2
  Bottom Layer w0.1: J6.23@8.055,10.45 v1(8.275,10.45) 8.976,10.45 9.046,10.38 9.715,10.38 9.95,10.145 9.95,8.9 10.8,8.05 13.145,8.05 13.45,7.745 13.45,7.555 13.755,7.25 13.755,6.945 U2.D6@13.8,6.9
ADS_BIAS: R32.2 R34.1 U2.B3 | length 7.6